# EAGLE board SparkFun_Color_Sensor_OPT4048_Mini-Panel (EAGLE 9.6.2), part 1 of 6
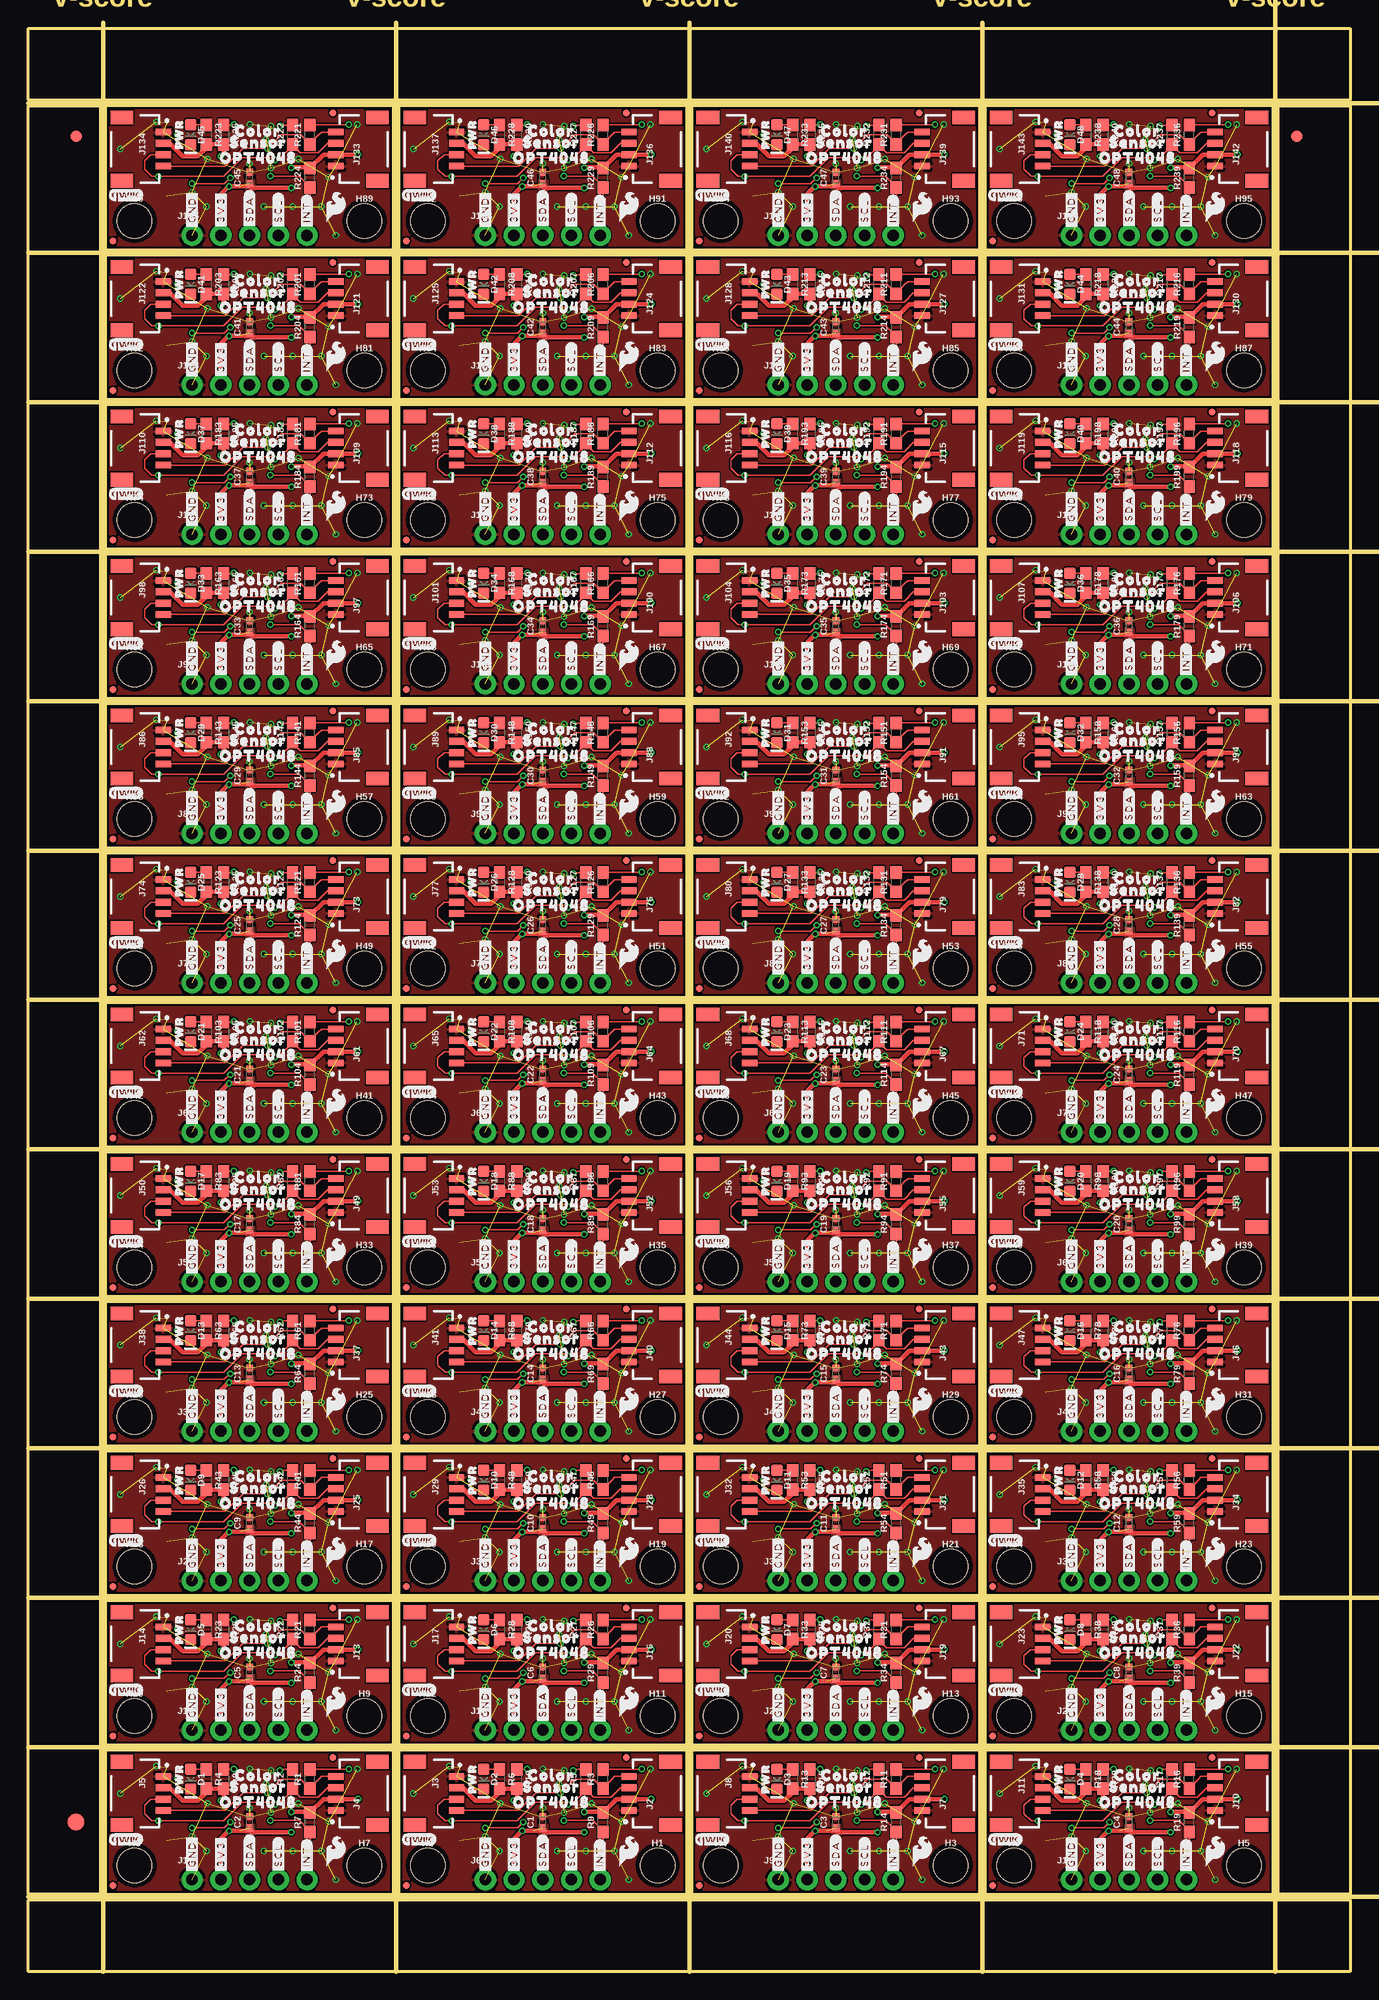
[diagram p0: board, top side]
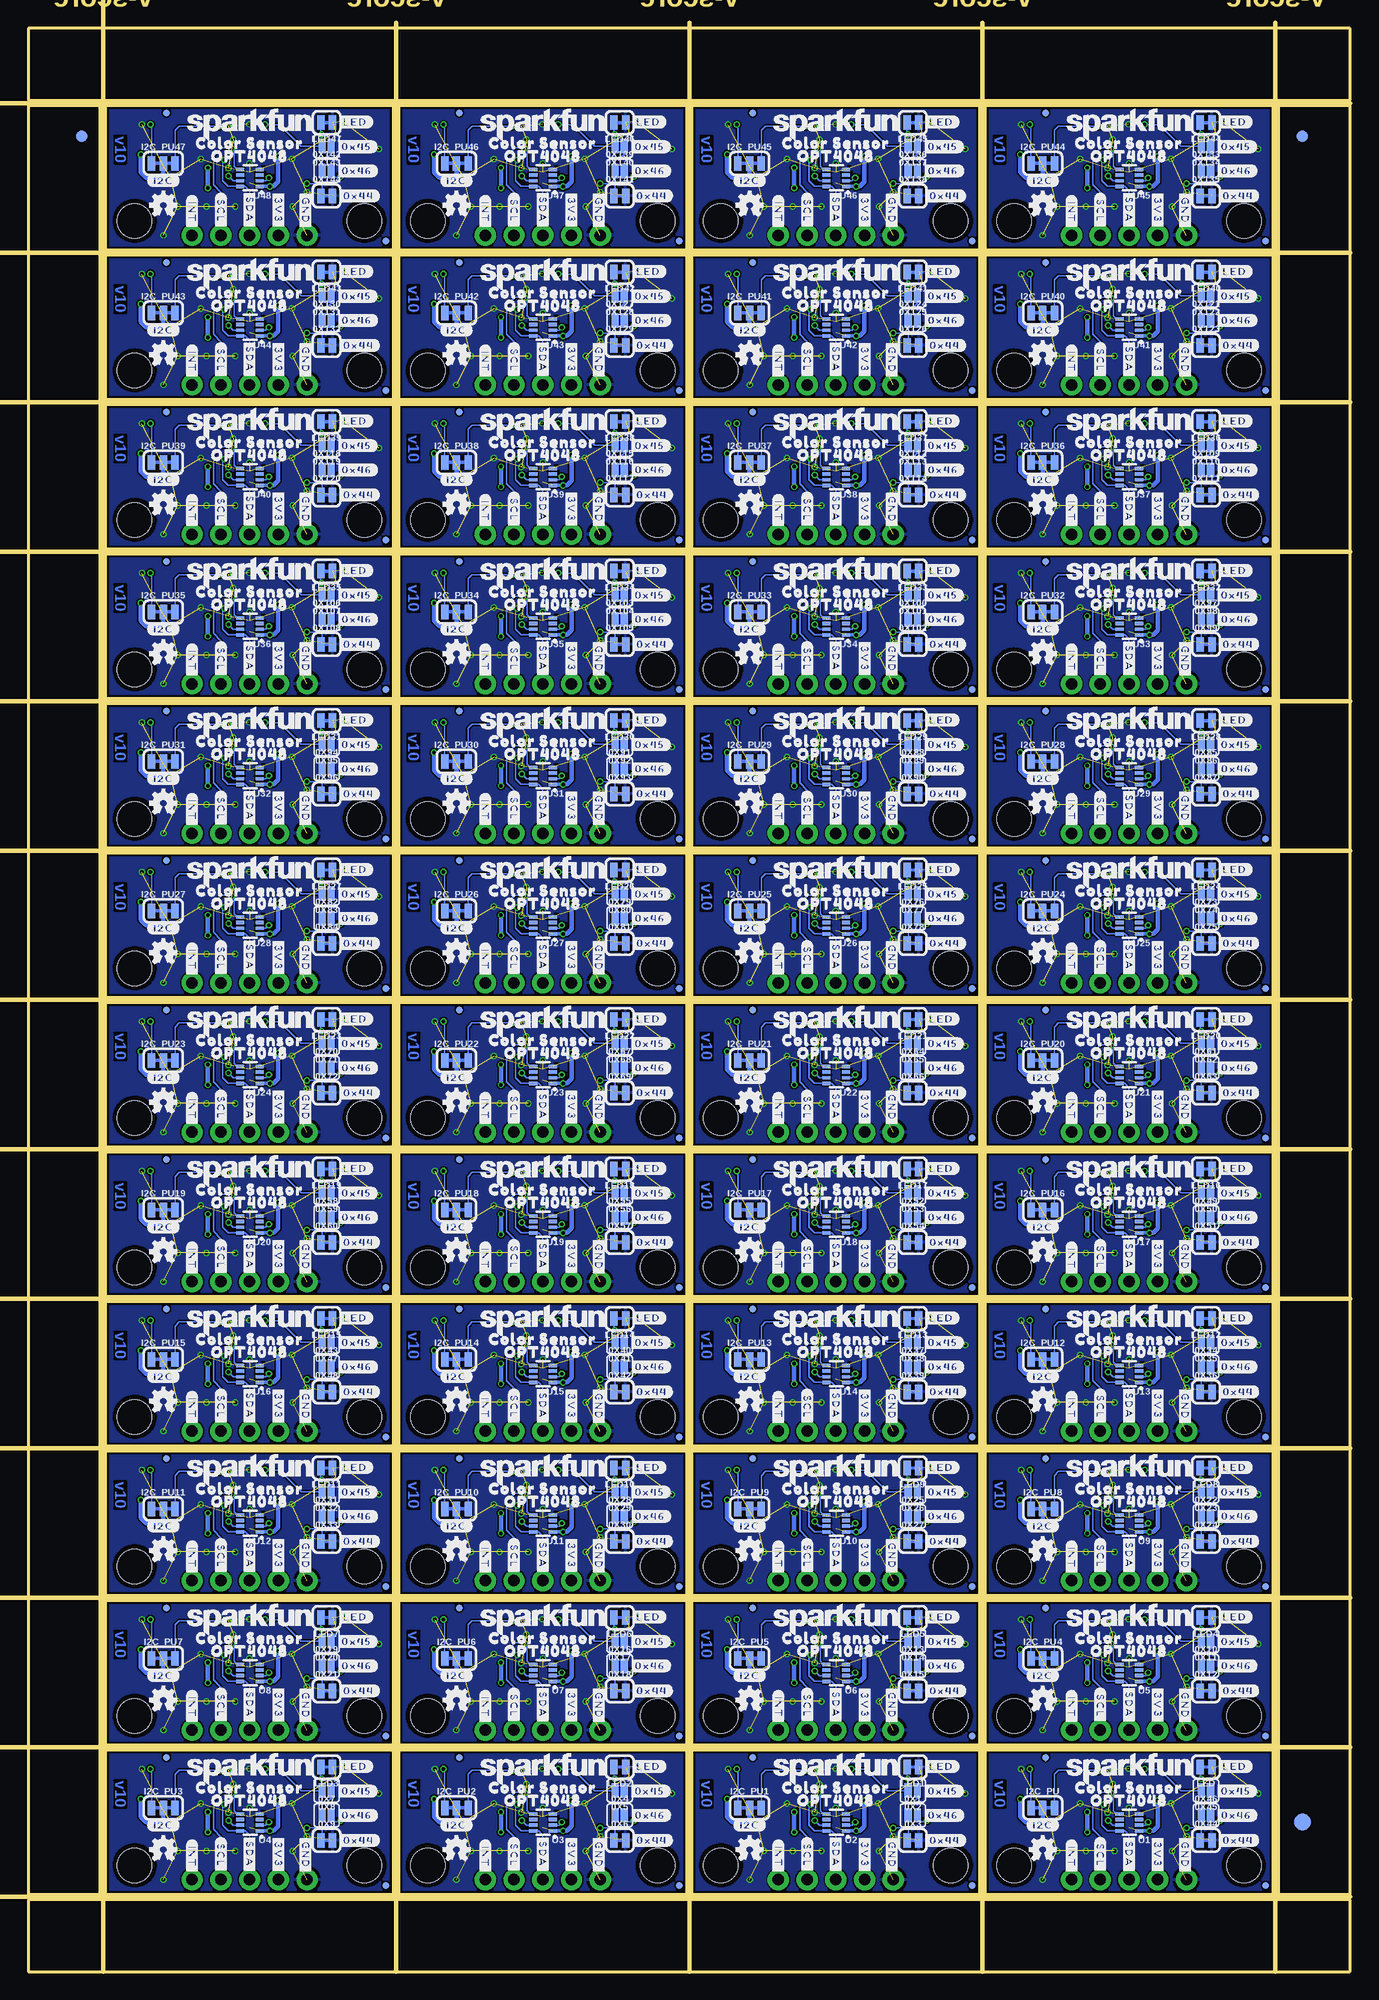
[diagram p1: board, bottom side, seen from below]

Size 116.84 x 171.7 mm. Coordinates in mm from the lower left corner, seen from the top.
Outline: 208 segments
Copper layers (1*16): Top 0.035mm / dielectric 1.5mm / Bottom 0.035mm
Design rules "SparkFun_Color_Sensor_OPT4048_Mini": minimum track width 5mil, minimum drill 0.3mm, track to track 5mil, track to pad 5mil, pad to pad 5mil, via to via 5mil, smd to smd 5mil, copper to edge 7mil, drill to drill 7mil, minimum pad ring 5mil, minimum via ring 5mil, stop-mask expansion 2.5mil, vias tented up to drill 25mil, thermal gap 10mil
Milling: 18 lines

## Footprints (pad centres in the part's own frame; a part is rotated, then mirrored left to right if it is on the bottom)
SMT-JUMPER_2_NO_SILK = smd 0.635 x 1.27: 1 -0.406,0; 2 0.406,0
SMT-JUMPER_2_NC_TRACE_SILK = smd 0.66 x 1.27: 1 -0.521,0; 2 0.521,0
0402-TIGHT = smd 0.6 x 0.6: 1 -0.5,0; 2 0.5,0
LED-0603 = smd 1 x 1: A -0.877,0; C 0.877,0
FIDUCIAL-1X2 = smd 1 x 1: 1 0,0
FIDUCIAL-1.5X3 = smd 1.5 x 1.5: 1 0,0
FIDUCIAL-MICRO = smd 0.635 x 0.635: 1 0,0
STAND-OFF-TIGHT = hole 3.048: 0,0
SMT-JUMPER_3_2-NC_TRACE_SILK = smd 0.66 x 1.27: 1 -1.041,0; 2 0,0; 3 1.041,0
1X05_NO_SILK = drill 1.016 pad 1.88: 1 0,0; 2 2.54,0; 3 5.08,0; 4 7.62,0; 5 10.16,0
JST04_1MM_RA = smd 0.6 x 1.35: 1 -1.5,0; 2 -0.5,0; 3 0.5,0; 4 1.5,0 | smd 1.2 x 2: NC1 2.8,-3.675; NC2 -2.8,-3.675
0603 = smd 1.1 x 1: 1 -0.85,0; 2 0.85,0
FCSOT = smd 0.72 x 0.3: P1 -0.889,0.762; P2 -0.889,0.262; P3 -0.889,-0.238; P4 -0.889,-0.738; P5 0.831,-0.738; P6 0.831,-0.238; P7 0.831,0.262; P8 0.831,0.762

## Placement (x,y rotation side)
0X1  JUMPER-SMT_2_NO_SILK  [SMT-JUMPER_2_NO_SILK]  38.66,13.82 0 bottom
0X2  JUMPER-SMT_2_NO_SILK  [SMT-JUMPER_2_NO_SILK]  38.66,16 180 bottom
0X3  JUMPER-SMT_2_NC_TRACE_SILK  [SMT-JUMPER_2_NC_TRACE_SILK]  38.66,11.61 0 bottom
0X4  JUMPER-SMT_2_NO_SILK  [SMT-JUMPER_2_NO_SILK]  64.57,13.82 0 bottom
0X5  JUMPER-SMT_2_NO_SILK  [SMT-JUMPER_2_NO_SILK]  64.57,16 180 bottom
0X6  JUMPER-SMT_2_NC_TRACE_SILK  [SMT-JUMPER_2_NC_TRACE_SILK]  64.57,11.61 0 bottom
0X7  JUMPER-SMT_2_NO_SILK  [SMT-JUMPER_2_NO_SILK]  90.47,13.82 0 bottom
0X8  JUMPER-SMT_2_NO_SILK  [SMT-JUMPER_2_NO_SILK]  90.47,16 180 bottom
0X9  JUMPER-SMT_2_NC_TRACE_SILK  [SMT-JUMPER_2_NC_TRACE_SILK]  90.47,11.61 0 bottom
0X10  JUMPER-SMT_2_NO_SILK  [SMT-JUMPER_2_NO_SILK]  12.75,27.03 0 bottom
0X11  JUMPER-SMT_2_NO_SILK  [SMT-JUMPER_2_NO_SILK]  12.75,29.21 180 bottom
0X12  JUMPER-SMT_2_NC_TRACE_SILK  [SMT-JUMPER_2_NC_TRACE_SILK]  12.75,24.82 0 bottom
0X13  JUMPER-SMT_2_NO_SILK  [SMT-JUMPER_2_NO_SILK]  38.66,27.03 0 bottom
0X14  JUMPER-SMT_2_NO_SILK  [SMT-JUMPER_2_NO_SILK]  38.66,29.21 180 bottom
0X15  JUMPER-SMT_2_NC_TRACE_SILK  [SMT-JUMPER_2_NC_TRACE_SILK]  38.66,24.82 0 bottom
0X16  JUMPER-SMT_2_NO_SILK  [SMT-JUMPER_2_NO_SILK]  64.57,27.03 0 bottom
0X17  JUMPER-SMT_2_NO_SILK  [SMT-JUMPER_2_NO_SILK]  64.57,29.21 180 bottom
0X18  JUMPER-SMT_2_NC_TRACE_SILK  [SMT-JUMPER_2_NC_TRACE_SILK]  64.57,24.82 0 bottom
0X19  JUMPER-SMT_2_NO_SILK  [SMT-JUMPER_2_NO_SILK]  90.47,27.03 0 bottom
0X20  JUMPER-SMT_2_NO_SILK  [SMT-JUMPER_2_NO_SILK]  90.47,29.21 180 bottom
0X21  JUMPER-SMT_2_NC_TRACE_SILK  [SMT-JUMPER_2_NC_TRACE_SILK]  90.47,24.82 0 bottom
0X22  JUMPER-SMT_2_NO_SILK  [SMT-JUMPER_2_NO_SILK]  12.75,40.23 0 bottom
0X23  JUMPER-SMT_2_NO_SILK  [SMT-JUMPER_2_NO_SILK]  12.75,42.42 180 bottom
0X24  JUMPER-SMT_2_NC_TRACE_SILK  [SMT-JUMPER_2_NC_TRACE_SILK]  12.75,38.02 0 bottom
0X25  JUMPER-SMT_2_NO_SILK  [SMT-JUMPER_2_NO_SILK]  38.66,40.23 0 bottom
0X26  JUMPER-SMT_2_NO_SILK  [SMT-JUMPER_2_NO_SILK]  38.66,42.42 180 bottom
0X27  JUMPER-SMT_2_NC_TRACE_SILK  [SMT-JUMPER_2_NC_TRACE_SILK]  38.66,38.02 0 bottom
0X28  JUMPER-SMT_2_NO_SILK  [SMT-JUMPER_2_NO_SILK]  64.57,40.23 0 bottom
0X29  JUMPER-SMT_2_NO_SILK  [SMT-JUMPER_2_NO_SILK]  64.57,42.42 180 bottom
0X30  JUMPER-SMT_2_NC_TRACE_SILK  [SMT-JUMPER_2_NC_TRACE_SILK]  64.57,38.02 0 bottom
0X31  JUMPER-SMT_2_NO_SILK  [SMT-JUMPER_2_NO_SILK]  90.47,40.23 0 bottom
0X32  JUMPER-SMT_2_NO_SILK  [SMT-JUMPER_2_NO_SILK]  90.47,42.42 180 bottom
0X33  JUMPER-SMT_2_NC_TRACE_SILK  [SMT-JUMPER_2_NC_TRACE_SILK]  90.47,38.02 0 bottom
0X34  JUMPER-SMT_2_NO_SILK  [SMT-JUMPER_2_NO_SILK]  12.75,53.44 0 bottom
0X35  JUMPER-SMT_2_NO_SILK  [SMT-JUMPER_2_NO_SILK]  12.75,55.63 180 bottom
0X36  JUMPER-SMT_2_NC_TRACE_SILK  [SMT-JUMPER_2_NC_TRACE_SILK]  12.75,51.23 0 bottom
0X37  JUMPER-SMT_2_NO_SILK  [SMT-JUMPER_2_NO_SILK]  38.66,53.44 0 bottom
0X38  JUMPER-SMT_2_NO_SILK  [SMT-JUMPER_2_NO_SILK]  38.66,55.63 180 bottom
0X39  JUMPER-SMT_2_NC_TRACE_SILK  [SMT-JUMPER_2_NC_TRACE_SILK]  38.66,51.23 0 bottom
0X40  JUMPER-SMT_2_NO_SILK  [SMT-JUMPER_2_NO_SILK]  64.57,53.44 0 bottom
0X41  JUMPER-SMT_2_NO_SILK  [SMT-JUMPER_2_NO_SILK]  64.57,55.63 180 bottom
0X42  JUMPER-SMT_2_NC_TRACE_SILK  [SMT-JUMPER_2_NC_TRACE_SILK]  64.57,51.23 0 bottom
0X43  JUMPER-SMT_2_NO_SILK  [SMT-JUMPER_2_NO_SILK]  90.47,53.44 0 bottom
0X44  JUMPER-SMT_2_NC_TRACE_SILK  [SMT-JUMPER_2_NC_TRACE_SILK]  12.75,11.61 0 bottom
0X45  JUMPER-SMT_2_NO_SILK  [SMT-JUMPER_2_NO_SILK]  12.75,16 180 bottom
0X46  JUMPER-SMT_2_NO_SILK  [SMT-JUMPER_2_NO_SILK]  12.75,13.82 0 bottom
0X47  JUMPER-SMT_2_NO_SILK  [SMT-JUMPER_2_NO_SILK]  90.47,55.63 180 bottom
0X48  JUMPER-SMT_2_NC_TRACE_SILK  [SMT-JUMPER_2_NC_TRACE_SILK]  90.47,51.23 0 bottom
0X49  JUMPER-SMT_2_NO_SILK  [SMT-JUMPER_2_NO_SILK]  12.75,66.65 0 bottom
0X50  JUMPER-SMT_2_NO_SILK  [SMT-JUMPER_2_NO_SILK]  12.75,68.83 180 bottom
0X51  JUMPER-SMT_2_NC_TRACE_SILK  [SMT-JUMPER_2_NC_TRACE_SILK]  12.75,64.44 0 bottom
0X52  JUMPER-SMT_2_NO_SILK  [SMT-JUMPER_2_NO_SILK]  38.66,66.65 0 bottom
0X53  JUMPER-SMT_2_NO_SILK  [SMT-JUMPER_2_NO_SILK]  38.66,68.83 180 bottom
0X54  JUMPER-SMT_2_NC_TRACE_SILK  [SMT-JUMPER_2_NC_TRACE_SILK]  38.66,64.44 0 bottom
0X55  JUMPER-SMT_2_NO_SILK  [SMT-JUMPER_2_NO_SILK]  64.57,66.65 0 bottom
0X56  JUMPER-SMT_2_NO_SILK  [SMT-JUMPER_2_NO_SILK]  64.57,68.83 180 bottom
0X57  JUMPER-SMT_2_NC_TRACE_SILK  [SMT-JUMPER_2_NC_TRACE_SILK]  64.57,64.44 0 bottom
0X58  JUMPER-SMT_2_NO_SILK  [SMT-JUMPER_2_NO_SILK]  90.47,66.65 0 bottom
0X59  JUMPER-SMT_2_NO_SILK  [SMT-JUMPER_2_NO_SILK]  90.47,68.83 180 bottom
0X60  JUMPER-SMT_2_NC_TRACE_SILK  [SMT-JUMPER_2_NC_TRACE_SILK]  90.47,64.44 0 bottom
0X61  JUMPER-SMT_2_NO_SILK  [SMT-JUMPER_2_NO_SILK]  12.75,79.86 0 bottom
0X62  JUMPER-SMT_2_NO_SILK  [SMT-JUMPER_2_NO_SILK]  12.75,82.04 180 bottom
0X63  JUMPER-SMT_2_NC_TRACE_SILK  [SMT-JUMPER_2_NC_TRACE_SILK]  12.75,77.65 0 bottom
0X64  JUMPER-SMT_2_NO_SILK  [SMT-JUMPER_2_NO_SILK]  38.66,79.86 0 bottom
0X65  JUMPER-SMT_2_NO_SILK  [SMT-JUMPER_2_NO_SILK]  38.66,82.04 180 bottom
0X66  JUMPER-SMT_2_NC_TRACE_SILK  [SMT-JUMPER_2_NC_TRACE_SILK]  38.66,77.65 0 bottom
0X67  JUMPER-SMT_2_NO_SILK  [SMT-JUMPER_2_NO_SILK]  64.57,79.86 0 bottom
0X68  JUMPER-SMT_2_NO_SILK  [SMT-JUMPER_2_NO_SILK]  64.57,82.04 180 bottom
0X69  JUMPER-SMT_2_NC_TRACE_SILK  [SMT-JUMPER_2_NC_TRACE_SILK]  64.57,77.65 0 bottom
0X70  JUMPER-SMT_2_NO_SILK  [SMT-JUMPER_2_NO_SILK]  90.47,79.86 0 bottom
0X71  JUMPER-SMT_2_NO_SILK  [SMT-JUMPER_2_NO_SILK]  90.47,82.04 180 bottom
0X72  JUMPER-SMT_2_NC_TRACE_SILK  [SMT-JUMPER_2_NC_TRACE_SILK]  90.47,77.65 0 bottom
0X73  JUMPER-SMT_2_NO_SILK  [SMT-JUMPER_2_NO_SILK]  12.75,93.07 0 bottom
0X74  JUMPER-SMT_2_NO_SILK  [SMT-JUMPER_2_NO_SILK]  12.75,95.25 180 bottom
0X75  JUMPER-SMT_2_NC_TRACE_SILK  [SMT-JUMPER_2_NC_TRACE_SILK]  12.75,90.86 0 bottom
0X76  JUMPER-SMT_2_NO_SILK  [SMT-JUMPER_2_NO_SILK]  38.66,93.07 0 bottom
0X77  JUMPER-SMT_2_NO_SILK  [SMT-JUMPER_2_NO_SILK]  38.66,95.25 180 bottom
0X78  JUMPER-SMT_2_NC_TRACE_SILK  [SMT-JUMPER_2_NC_TRACE_SILK]  38.66,90.86 0 bottom
0X79  JUMPER-SMT_2_NO_SILK  [SMT-JUMPER_2_NO_SILK]  64.57,93.07 0 bottom
0X80  JUMPER-SMT_2_NO_SILK  [SMT-JUMPER_2_NO_SILK]  64.57,95.25 180 bottom
0X81  JUMPER-SMT_2_NC_TRACE_SILK  [SMT-JUMPER_2_NC_TRACE_SILK]  64.57,90.86 0 bottom
0X82  JUMPER-SMT_2_NO_SILK  [SMT-JUMPER_2_NO_SILK]  90.47,93.07 0 bottom
0X83  JUMPER-SMT_2_NO_SILK  [SMT-JUMPER_2_NO_SILK]  90.47,95.25 180 bottom
0X84  JUMPER-SMT_2_NC_TRACE_SILK  [SMT-JUMPER_2_NC_TRACE_SILK]  90.47,90.86 0 bottom
0X85  JUMPER-SMT_2_NO_SILK  [SMT-JUMPER_2_NO_SILK]  12.75,106.27 0 bottom
0X86  JUMPER-SMT_2_NO_SILK  [SMT-JUMPER_2_NO_SILK]  12.75,108.46 180 bottom
0X87  JUMPER-SMT_2_NC_TRACE_SILK  [SMT-JUMPER_2_NC_TRACE_SILK]  12.75,104.06 0 bottom
0X88  JUMPER-SMT_2_NO_SILK  [SMT-JUMPER_2_NO_SILK]  38.66,106.27 0 bottom
0X89  JUMPER-SMT_2_NO_SILK  [SMT-JUMPER_2_NO_SILK]  38.66,108.46 180 bottom
0X90  JUMPER-SMT_2_NC_TRACE_SILK  [SMT-JUMPER_2_NC_TRACE_SILK]  38.66,104.06 0 bottom
0X91  JUMPER-SMT_2_NO_SILK  [SMT-JUMPER_2_NO_SILK]  64.57,106.27 0 bottom
0X92  JUMPER-SMT_2_NO_SILK  [SMT-JUMPER_2_NO_SILK]  64.57,108.46 180 bottom
0X93  JUMPER-SMT_2_NC_TRACE_SILK  [SMT-JUMPER_2_NC_TRACE_SILK]  64.57,104.06 0 bottom
0X94  JUMPER-SMT_2_NO_SILK  [SMT-JUMPER_2_NO_SILK]  90.47,106.27 0 bottom
0X95  JUMPER-SMT_2_NO_SILK  [SMT-JUMPER_2_NO_SILK]  90.47,108.46 180 bottom
0X96  JUMPER-SMT_2_NC_TRACE_SILK  [SMT-JUMPER_2_NC_TRACE_SILK]  90.47,104.06 0 bottom
0X97  JUMPER-SMT_2_NO_SILK  [SMT-JUMPER_2_NO_SILK]  12.75,119.48 0 bottom
0X98  JUMPER-SMT_2_NO_SILK  [SMT-JUMPER_2_NO_SILK]  12.75,121.67 180 bottom
0X99  JUMPER-SMT_2_NC_TRACE_SILK  [SMT-JUMPER_2_NC_TRACE_SILK]  12.75,117.27 0 bottom
0X100  JUMPER-SMT_2_NO_SILK  [SMT-JUMPER_2_NO_SILK]  38.66,119.48 0 bottom
0X101  JUMPER-SMT_2_NO_SILK  [SMT-JUMPER_2_NO_SILK]  38.66,121.67 180 bottom
0X102  JUMPER-SMT_2_NC_TRACE_SILK  [SMT-JUMPER_2_NC_TRACE_SILK]  38.66,117.27 0 bottom
0X103  JUMPER-SMT_2_NO_SILK  [SMT-JUMPER_2_NO_SILK]  64.57,119.48 0 bottom
0X104  JUMPER-SMT_2_NO_SILK  [SMT-JUMPER_2_NO_SILK]  64.57,121.67 180 bottom
0X105  JUMPER-SMT_2_NC_TRACE_SILK  [SMT-JUMPER_2_NC_TRACE_SILK]  64.57,117.27 0 bottom
0X106  JUMPER-SMT_2_NO_SILK  [SMT-JUMPER_2_NO_SILK]  90.47,119.48 0 bottom
0X107  JUMPER-SMT_2_NO_SILK  [SMT-JUMPER_2_NO_SILK]  90.47,121.67 180 bottom
0X108  JUMPER-SMT_2_NC_TRACE_SILK  [SMT-JUMPER_2_NC_TRACE_SILK]  90.47,117.27 0 bottom
0X109  JUMPER-SMT_2_NO_SILK  [SMT-JUMPER_2_NO_SILK]  12.75,132.69 0 bottom
0X110  JUMPER-SMT_2_NO_SILK  [SMT-JUMPER_2_NO_SILK]  12.75,134.87 180 bottom
0X111  JUMPER-SMT_2_NC_TRACE_SILK  [SMT-JUMPER_2_NC_TRACE_SILK]  12.75,130.48 0 bottom
0X112  JUMPER-SMT_2_NO_SILK  [SMT-JUMPER_2_NO_SILK]  38.66,132.69 0 bottom
0X113  JUMPER-SMT_2_NO_SILK  [SMT-JUMPER_2_NO_SILK]  38.66,134.87 180 bottom
0X114  JUMPER-SMT_2_NC_TRACE_SILK  [SMT-JUMPER_2_NC_TRACE_SILK]  38.66,130.48 0 bottom
0X115  JUMPER-SMT_2_NO_SILK  [SMT-JUMPER_2_NO_SILK]  64.57,132.69 0 bottom
0X116  JUMPER-SMT_2_NO_SILK  [SMT-JUMPER_2_NO_SILK]  64.57,134.87 180 bottom
0X117  JUMPER-SMT_2_NC_TRACE_SILK  [SMT-JUMPER_2_NC_TRACE_SILK]  64.57,130.48 0 bottom
0X118  JUMPER-SMT_2_NO_SILK  [SMT-JUMPER_2_NO_SILK]  90.47,132.69 0 bottom
0X119  JUMPER-SMT_2_NO_SILK  [SMT-JUMPER_2_NO_SILK]  90.47,134.87 180 bottom
0X120  JUMPER-SMT_2_NC_TRACE_SILK  [SMT-JUMPER_2_NC_TRACE_SILK]  90.47,130.48 0 bottom
0X121  JUMPER-SMT_2_NO_SILK  [SMT-JUMPER_2_NO_SILK]  12.75,145.9 0 bottom
0X122  JUMPER-SMT_2_NO_SILK  [SMT-JUMPER_2_NO_SILK]  12.75,148.08 180 bottom
0X123  JUMPER-SMT_2_NC_TRACE_SILK  [SMT-JUMPER_2_NC_TRACE_SILK]  12.75,143.69 0 bottom
0X124  JUMPER-SMT_2_NO_SILK  [SMT-JUMPER_2_NO_SILK]  38.66,145.9 0 bottom
0X125  JUMPER-SMT_2_NO_SILK  [SMT-JUMPER_2_NO_SILK]  38.66,148.08 180 bottom
0X126  JUMPER-SMT_2_NC_TRACE_SILK  [SMT-JUMPER_2_NC_TRACE_SILK]  38.66,143.69 0 bottom
0X127  JUMPER-SMT_2_NO_SILK  [SMT-JUMPER_2_NO_SILK]  64.57,145.9 0 bottom
0X128  JUMPER-SMT_2_NO_SILK  [SMT-JUMPER_2_NO_SILK]  64.57,148.08 180 bottom
0X129  JUMPER-SMT_2_NC_TRACE_SILK  [SMT-JUMPER_2_NC_TRACE_SILK]  64.57,143.69 0 bottom
0X130  JUMPER-SMT_2_NO_SILK  [SMT-JUMPER_2_NO_SILK]  90.47,145.9 0 bottom
0X131  JUMPER-SMT_2_NO_SILK  [SMT-JUMPER_2_NO_SILK]  90.47,148.08 180 bottom
0X132  JUMPER-SMT_2_NC_TRACE_SILK  [SMT-JUMPER_2_NC_TRACE_SILK]  90.47,143.69 0 bottom
0X133  JUMPER-SMT_2_NO_SILK  [SMT-JUMPER_2_NO_SILK]  12.75,159.11 0 bottom
0X134  JUMPER-SMT_2_NO_SILK  [SMT-JUMPER_2_NO_SILK]  12.75,161.29 180 bottom
0X135  JUMPER-SMT_2_NC_TRACE_SILK  [SMT-JUMPER_2_NC_TRACE_SILK]  12.75,156.9 0 bottom
0X136  JUMPER-SMT_2_NO_SILK  [SMT-JUMPER_2_NO_SILK]  38.66,159.11 0 bottom
0X137  JUMPER-SMT_2_NO_SILK  [SMT-JUMPER_2_NO_SILK]  38.66,161.29 180 bottom
0X138  JUMPER-SMT_2_NC_TRACE_SILK  [SMT-JUMPER_2_NC_TRACE_SILK]  38.66,156.9 0 bottom
0X139  JUMPER-SMT_2_NO_SILK  [SMT-JUMPER_2_NO_SILK]  64.57,159.11 0 bottom
0X140  JUMPER-SMT_2_NO_SILK  [SMT-JUMPER_2_NO_SILK]  64.57,161.29 180 bottom
0X141  JUMPER-SMT_2_NC_TRACE_SILK  [SMT-JUMPER_2_NC_TRACE_SILK]  64.57,156.9 0 bottom
0X142  JUMPER-SMT_2_NO_SILK  [SMT-JUMPER_2_NO_SILK]  90.47,159.11 0 bottom
0X143  JUMPER-SMT_2_NO_SILK  [SMT-JUMPER_2_NO_SILK]  90.47,161.29 180 bottom
0X144  JUMPER-SMT_2_NC_TRACE_SILK  [SMT-JUMPER_2_NC_TRACE_SILK]  90.47,156.9 0 bottom
C1  0.1uF  [0402-TIGHT]  45.47,13.21 90 top
C2  0.1uF  [0402-TIGHT]  19.56,13.21 90 top
C3  0.1uF  [0402-TIGHT]  71.37,13.21 90 top
C4  0.1uF  [0402-TIGHT]  97.28,13.21 90 top
C5  0.1uF  [0402-TIGHT]  19.56,26.42 90 top
C6  0.1uF  [0402-TIGHT]  45.47,26.42 90 top
C7  0.1uF  [0402-TIGHT]  71.37,26.42 90 top
C8  0.1uF  [0402-TIGHT]  97.28,26.42 90 top
C9  0.1uF  [0402-TIGHT]  19.56,39.62 90 top
C10  0.1uF  [0402-TIGHT]  45.47,39.62 90 top
C11  0.1uF  [0402-TIGHT]  71.37,39.62 90 top
C12  0.1uF  [0402-TIGHT]  97.28,39.62 90 top
C13  0.1uF  [0402-TIGHT]  19.56,52.83 90 top
C14  0.1uF  [0402-TIGHT]  45.47,52.83 90 top
C15  0.1uF  [0402-TIGHT]  71.37,52.83 90 top
C16  0.1uF  [0402-TIGHT]  97.28,52.83 90 top
C17  0.1uF  [0402-TIGHT]  19.56,66.04 90 top
C18  0.1uF  [0402-TIGHT]  45.47,66.04 90 top
C19  0.1uF  [0402-TIGHT]  71.37,66.04 90 top
C20  0.1uF  [0402-TIGHT]  97.28,66.04 90 top
C21  0.1uF  [0402-TIGHT]  19.56,79.25 90 top
C22  0.1uF  [0402-TIGHT]  45.47,79.25 90 top
C23  0.1uF  [0402-TIGHT]  71.37,79.25 90 top
C24  0.1uF  [0402-TIGHT]  97.28,79.25 90 top
C25  0.1uF  [0402-TIGHT]  19.56,92.46 90 top
C26  0.1uF  [0402-TIGHT]  45.47,92.46 90 top
C27  0.1uF  [0402-TIGHT]  71.37,92.46 90 top
C28  0.1uF  [0402-TIGHT]  97.28,92.46 90 top
C29  0.1uF  [0402-TIGHT]  19.56,105.66 90 top
C30  0.1uF  [0402-TIGHT]  45.47,105.66 90 top
C31  0.1uF  [0402-TIGHT]  71.37,105.66 90 top
C32  0.1uF  [0402-TIGHT]  97.28,105.66 90 top
C33  0.1uF  [0402-TIGHT]  19.56,118.87 90 top
C34  0.1uF  [0402-TIGHT]  45.47,118.87 90 top
C35  0.1uF  [0402-TIGHT]  71.37,118.87 90 top
C36  0.1uF  [0402-TIGHT]  97.28,118.87 90 top
C37  0.1uF  [0402-TIGHT]  19.56,132.08 90 top
C38  0.1uF  [0402-TIGHT]  45.47,132.08 90 top
C39  0.1uF  [0402-TIGHT]  71.37,132.08 90 top
C40  0.1uF  [0402-TIGHT]  97.28,132.08 90 top
C41  0.1uF  [0402-TIGHT]  19.56,145.29 90 top
C42  0.1uF  [0402-TIGHT]  45.47,145.29 90 top
C43  0.1uF  [0402-TIGHT]  71.37,145.29 90 top
C44  0.1uF  [0402-TIGHT]  97.28,145.29 90 top
C45  0.1uF  [0402-TIGHT]  19.56,158.5 90 top
C46  0.1uF  [0402-TIGHT]  45.47,158.5 90 top
C47  0.1uF  [0402-TIGHT]  71.37,158.5 90 top
C48  0.1uF  [0402-TIGHT]  97.28,158.5 90 top
D1  RED  [LED-0603]  14.35,17.02 270 top
D2  RED  [LED-0603]  40.26,17.02 270 top
D3  RED  [LED-0603]  66.17,17.02 270 top
D4  RED  [LED-0603]  92.08,17.02 270 top
D5  RED  [LED-0603]  14.35,30.23 270 top
D6  RED  [LED-0603]  40.26,30.23 270 top
D7  RED  [LED-0603]  66.17,30.23 270 top
D8  RED  [LED-0603]  92.08,30.23 270 top
D9  RED  [LED-0603]  14.35,43.43 270 top
D10  RED  [LED-0603]  40.26,43.43 270 top
D11  RED  [LED-0603]  66.17,43.43 270 top
D12  RED  [LED-0603]  92.08,43.43 270 top
D13  RED  [LED-0603]  14.35,56.64 270 top
D14  RED  [LED-0603]  40.26,56.64 270 top
D15  RED  [LED-0603]  66.17,56.64 270 top
D16  RED  [LED-0603]  92.08,56.64 270 top
D17  RED  [LED-0603]  14.35,69.85 270 top
D18  RED  [LED-0603]  40.26,69.85 270 top
D19  RED  [LED-0603]  66.17,69.85 270 top
D20  RED  [LED-0603]  92.08,69.85 270 top
D21  RED  [LED-0603]  14.35,83.06 270 top
D22  RED  [LED-0603]  40.26,83.06 270 top
D23  RED  [LED-0603]  66.17,83.06 270 top
D24  RED  [LED-0603]  92.08,83.06 270 top
D25  RED  [LED-0603]  14.35,96.27 270 top
D26  RED  [LED-0603]  40.26,96.27 270 top
D27  RED  [LED-0603]  66.17,96.27 270 top
D28  RED  [LED-0603]  92.08,96.27 270 top
D29  RED  [LED-0603]  14.35,109.47 270 top
D30  RED  [LED-0603]  40.26,109.47 270 top
D31  RED  [LED-0603]  66.17,109.47 270 top
D32  RED  [LED-0603]  92.08,109.47 270 top
D33  RED  [LED-0603]  14.35,122.68 270 top
D34  RED  [LED-0603]  40.26,122.68 270 top
D35  RED  [LED-0603]  66.17,122.68 270 top
D36  RED  [LED-0603]  92.08,122.68 270 top
D37  RED  [LED-0603]  14.35,135.89 270 top
D38  RED  [LED-0603]  40.26,135.89 270 top
D39  RED  [LED-0603]  66.17,135.89 270 top
D40  RED  [LED-0603]  92.08,135.89 270 top
D41  RED  [LED-0603]  14.35,149.1 270 top
D42  RED  [LED-0603]  40.26,149.1 270 top
D43  RED  [LED-0603]  66.17,149.1 270 top
D44  RED  [LED-0603]  92.08,149.1 270 top
D45  RED  [LED-0603]  14.35,162.31 270 top
D46  RED  [LED-0603]  40.26,162.31 270 top
D47  RED  [LED-0603]  66.17,162.31 270 top
D48  RED  [LED-0603]  92.08,162.31 270 top
E$1  [FIDUCIAL-1X2]  4.23,162.18 0 top
E$2  [FIDUCIAL-1X2]  4.23,162.18 0 bottom
E$3  [FIDUCIAL-1X2]  112.1,162.18 0 top
E$4  [FIDUCIAL-1X2]  112.1,162.18 0 bottom
E$5  [FIDUCIAL-1.5X3]  4.23,13.21 0 top
E$6  [FIDUCIAL-1.5X3]  4.23,13.21 0 bottom
FD1  FIDUCIALUFIDUCIAL  [FIDUCIAL-MICRO]  52.83,18.92 0 bottom
FD2  FIDUCIALUFIDUCIAL  [FIDUCIAL-MICRO]  33.4,7.62 0 bottom
FD3  FIDUCIALUFIDUCIAL  [FIDUCIAL-MICRO]  33.4,7.62 0 top
FD4  FIDUCIALUFIDUCIAL  [FIDUCIAL-MICRO]  52.83,18.92 0 top
FD5  FIDUCIALUFIDUCIAL  [FIDUCIAL-MICRO]  26.92,18.92 0 bottom
FD6  FIDUCIALUFIDUCIAL  [FIDUCIAL-MICRO]  7.49,7.62 0 bottom
FD7  FIDUCIALUFIDUCIAL  [FIDUCIAL-MICRO]  7.49,7.62 0 top
FD8  FIDUCIALUFIDUCIAL  [FIDUCIAL-MICRO]  26.92,18.92 0 top
FD9  FIDUCIALUFIDUCIAL  [FIDUCIAL-MICRO]  78.74,18.92 0 bottom
FD10  FIDUCIALUFIDUCIAL  [FIDUCIAL-MICRO]  59.31,7.62 0 bottom
FD11  FIDUCIALUFIDUCIAL  [FIDUCIAL-MICRO]  59.31,7.62 0 top
FD12  FIDUCIALUFIDUCIAL  [FIDUCIAL-MICRO]  78.74,18.92 0 top
FD13  FIDUCIALUFIDUCIAL  [FIDUCIAL-MICRO]  104.65,18.92 0 bottom
FD14  FIDUCIALUFIDUCIAL  [FIDUCIAL-MICRO]  85.22,7.62 0 bottom
FD15  FIDUCIALUFIDUCIAL  [FIDUCIAL-MICRO]  85.22,7.62 0 top
FD16  FIDUCIALUFIDUCIAL  [FIDUCIAL-MICRO]  104.65,18.92 0 top
FD17  FIDUCIALUFIDUCIAL  [FIDUCIAL-MICRO]  26.92,32.13 0 bottom
FD18  FIDUCIALUFIDUCIAL  [FIDUCIAL-MICRO]  7.49,20.83 0 bottom
FD19  FIDUCIALUFIDUCIAL  [FIDUCIAL-MICRO]  7.49,20.83 0 top
FD20  FIDUCIALUFIDUCIAL  [FIDUCIAL-MICRO]  26.92,32.13 0 top
FD21  FIDUCIALUFIDUCIAL  [FIDUCIAL-MICRO]  52.83,32.13 0 bottom
FD22  FIDUCIALUFIDUCIAL  [FIDUCIAL-MICRO]  33.4,20.83 0 bottom
FD23  FIDUCIALUFIDUCIAL  [FIDUCIAL-MICRO]  33.4,20.83 0 top
FD24  FIDUCIALUFIDUCIAL  [FIDUCIAL-MICRO]  52.83,32.13 0 top
FD25  FIDUCIALUFIDUCIAL  [FIDUCIAL-MICRO]  78.74,32.13 0 bottom
FD26  FIDUCIALUFIDUCIAL  [FIDUCIAL-MICRO]  59.31,20.83 0 bottom
FD27  FIDUCIALUFIDUCIAL  [FIDUCIAL-MICRO]  59.31,20.83 0 top
FD28  FIDUCIALUFIDUCIAL  [FIDUCIAL-MICRO]  78.74,32.13 0 top
FD29  FIDUCIALUFIDUCIAL  [FIDUCIAL-MICRO]  104.65,32.13 0 bottom
FD30  FIDUCIALUFIDUCIAL  [FIDUCIAL-MICRO]  85.22,20.83 0 bottom
FD31  FIDUCIALUFIDUCIAL  [FIDUCIAL-MICRO]  85.22,20.83 0 top
FD32  FIDUCIALUFIDUCIAL  [FIDUCIAL-MICRO]  104.65,32.13 0 top
FD33  FIDUCIALUFIDUCIAL  [FIDUCIAL-MICRO]  26.92,45.34 0 bottom
FD34  FIDUCIALUFIDUCIAL  [FIDUCIAL-MICRO]  7.49,34.04 0 bottom
FD35  FIDUCIALUFIDUCIAL  [FIDUCIAL-MICRO]  7.49,34.04 0 top
FD36  FIDUCIALUFIDUCIAL  [FIDUCIAL-MICRO]  26.92,45.34 0 top
FD37  FIDUCIALUFIDUCIAL  [FIDUCIAL-MICRO]  52.83,45.34 0 bottom
FD38  FIDUCIALUFIDUCIAL  [FIDUCIAL-MICRO]  33.4,34.04 0 bottom
FD39  FIDUCIALUFIDUCIAL  [FIDUCIAL-MICRO]  33.4,34.04 0 top
FD40  FIDUCIALUFIDUCIAL  [FIDUCIAL-MICRO]  52.83,45.34 0 top
FD41  FIDUCIALUFIDUCIAL  [FIDUCIAL-MICRO]  78.74,45.34 0 bottom
FD42  FIDUCIALUFIDUCIAL  [FIDUCIAL-MICRO]  59.31,34.04 0 bottom
FD43  FIDUCIALUFIDUCIAL  [FIDUCIAL-MICRO]  59.31,34.04 0 top
FD44  FIDUCIALUFIDUCIAL  [FIDUCIAL-MICRO]  78.74,45.34 0 top
FD45  FIDUCIALUFIDUCIAL  [FIDUCIAL-MICRO]  104.65,45.34 0 bottom
FD46  FIDUCIALUFIDUCIAL  [FIDUCIAL-MICRO]  85.22,34.04 0 bottom
FD47  FIDUCIALUFIDUCIAL  [FIDUCIAL-MICRO]  85.22,34.04 0 top
FD48  FIDUCIALUFIDUCIAL  [FIDUCIAL-MICRO]  104.65,45.34 0 top
FD49  FIDUCIALUFIDUCIAL  [FIDUCIAL-MICRO]  26.92,58.55 0 bottom
FD50  FIDUCIALUFIDUCIAL  [FIDUCIAL-MICRO]  7.49,47.24 0 bottom
FD51  FIDUCIALUFIDUCIAL  [FIDUCIAL-MICRO]  7.49,47.24 0 top
FD52  FIDUCIALUFIDUCIAL  [FIDUCIAL-MICRO]  26.92,58.55 0 top
FD53  FIDUCIALUFIDUCIAL  [FIDUCIAL-MICRO]  52.83,58.55 0 bottom
FD54  FIDUCIALUFIDUCIAL  [FIDUCIAL-MICRO]  33.4,47.24 0 bottom
FD55  FIDUCIALUFIDUCIAL  [FIDUCIAL-MICRO]  33.4,47.24 0 top
FD56  FIDUCIALUFIDUCIAL  [FIDUCIAL-MICRO]  52.83,58.55 0 top
FD57  FIDUCIALUFIDUCIAL  [FIDUCIAL-MICRO]  78.74,58.55 0 bottom
FD58  FIDUCIALUFIDUCIAL  [FIDUCIAL-MICRO]  59.31,47.24 0 bottom
FD59  FIDUCIALUFIDUCIAL  [FIDUCIAL-MICRO]  59.31,47.24 0 top
FD60  FIDUCIALUFIDUCIAL  [FIDUCIAL-MICRO]  78.74,58.55 0 top
FD61  FIDUCIALUFIDUCIAL  [FIDUCIAL-MICRO]  104.65,58.55 0 bottom
FD62  FIDUCIALUFIDUCIAL  [FIDUCIAL-MICRO]  85.22,47.24 0 bottom
FD63  FIDUCIALUFIDUCIAL  [FIDUCIAL-MICRO]  85.22,47.24 0 top
FD64  FIDUCIALUFIDUCIAL  [FIDUCIAL-MICRO]  104.65,58.55 0 top
FD65  FIDUCIALUFIDUCIAL  [FIDUCIAL-MICRO]  26.92,71.76 0 bottom
FD66  FIDUCIALUFIDUCIAL  [FIDUCIAL-MICRO]  7.49,60.45 0 bottom
FD67  FIDUCIALUFIDUCIAL  [FIDUCIAL-MICRO]  7.49,60.45 0 top
FD68  FIDUCIALUFIDUCIAL  [FIDUCIAL-MICRO]  26.92,71.76 0 top
FD69  FIDUCIALUFIDUCIAL  [FIDUCIAL-MICRO]  52.83,71.76 0 bottom
FD70  FIDUCIALUFIDUCIAL  [FIDUCIAL-MICRO]  33.4,60.45 0 bottom
FD71  FIDUCIALUFIDUCIAL  [FIDUCIAL-MICRO]  33.4,60.45 0 top
FD72  FIDUCIALUFIDUCIAL  [FIDUCIAL-MICRO]  52.83,71.76 0 top
FD73  FIDUCIALUFIDUCIAL  [FIDUCIAL-MICRO]  78.74,71.76 0 bottom
FD74  FIDUCIALUFIDUCIAL  [FIDUCIAL-MICRO]  59.31,60.45 0 bottom
FD75  FIDUCIALUFIDUCIAL  [FIDUCIAL-MICRO]  59.31,60.45 0 top
FD76  FIDUCIALUFIDUCIAL  [FIDUCIAL-MICRO]  78.74,71.76 0 top
FD77  FIDUCIALUFIDUCIAL  [FIDUCIAL-MICRO]  104.65,71.76 0 bottom
FD78  FIDUCIALUFIDUCIAL  [FIDUCIAL-MICRO]  85.22,60.45 0 bottom
FD79  FIDUCIALUFIDUCIAL  [FIDUCIAL-MICRO]  85.22,60.45 0 top
FD80  FIDUCIALUFIDUCIAL  [FIDUCIAL-MICRO]  104.65,71.76 0 top
FD81  FIDUCIALUFIDUCIAL  [FIDUCIAL-MICRO]  26.92,84.96 0 bottom
FD82  FIDUCIALUFIDUCIAL  [FIDUCIAL-MICRO]  7.49,73.66 0 bottom
FD83  FIDUCIALUFIDUCIAL  [FIDUCIAL-MICRO]  7.49,73.66 0 top
FD84  FIDUCIALUFIDUCIAL  [FIDUCIAL-MICRO]  26.92,84.96 0 top
FD85  FIDUCIALUFIDUCIAL  [FIDUCIAL-MICRO]  52.83,84.96 0 bottom
FD86  FIDUCIALUFIDUCIAL  [FIDUCIAL-MICRO]  33.4,73.66 0 bottom
FD87  FIDUCIALUFIDUCIAL  [FIDUCIAL-MICRO]  33.4,73.66 0 top
FD88  FIDUCIALUFIDUCIAL  [FIDUCIAL-MICRO]  52.83,84.96 0 top
FD89  FIDUCIALUFIDUCIAL  [FIDUCIAL-MICRO]  78.74,84.96 0 bottom
FD90  FIDUCIALUFIDUCIAL  [FIDUCIAL-MICRO]  59.31,73.66 0 bottom
FD91  FIDUCIALUFIDUCIAL  [FIDUCIAL-MICRO]  59.31,73.66 0 top
FD92  FIDUCIALUFIDUCIAL  [FIDUCIAL-MICRO]  78.74,84.96 0 top
FD93  FIDUCIALUFIDUCIAL  [FIDUCIAL-MICRO]  104.65,84.96 0 bottom
FD94  FIDUCIALUFIDUCIAL  [FIDUCIAL-MICRO]  85.22,73.66 0 bottom
FD95  FIDUCIALUFIDUCIAL  [FIDUCIAL-MICRO]  85.22,73.66 0 top
FD96  FIDUCIALUFIDUCIAL  [FIDUCIAL-MICRO]  104.65,84.96 0 top
FD97  FIDUCIALUFIDUCIAL  [FIDUCIAL-MICRO]  26.92,98.17 0 bottom
FD98  FIDUCIALUFIDUCIAL  [FIDUCIAL-MICRO]  7.49,86.87 0 bottom
FD99  FIDUCIALUFIDUCIAL  [FIDUCIAL-MICRO]  7.49,86.87 0 top
FD100  FIDUCIALUFIDUCIAL  [FIDUCIAL-MICRO]  26.92,98.17 0 top
FD101  FIDUCIALUFIDUCIAL  [FIDUCIAL-MICRO]  52.83,98.17 0 bottom
FD102  FIDUCIALUFIDUCIAL  [FIDUCIAL-MICRO]  33.4,86.87 0 bottom
FD103  FIDUCIALUFIDUCIAL  [FIDUCIAL-MICRO]  33.4,86.87 0 top
FD104  FIDUCIALUFIDUCIAL  [FIDUCIAL-MICRO]  52.83,98.17 0 top
FD105  FIDUCIALUFIDUCIAL  [FIDUCIAL-MICRO]  78.74,98.17 0 bottom
FD106  FIDUCIALUFIDUCIAL  [FIDUCIAL-MICRO]  59.31,86.87 0 bottom
FD107  FIDUCIALUFIDUCIAL  [FIDUCIAL-MICRO]  59.31,86.87 0 top
FD108  FIDUCIALUFIDUCIAL  [FIDUCIAL-MICRO]  78.74,98.17 0 top
FD109  FIDUCIALUFIDUCIAL  [FIDUCIAL-MICRO]  104.65,98.17 0 bottom
FD110  FIDUCIALUFIDUCIAL  [FIDUCIAL-MICRO]  85.22,86.87 0 bottom
FD111  FIDUCIALUFIDUCIAL  [FIDUCIAL-MICRO]  85.22,86.87 0 top
FD112  FIDUCIALUFIDUCIAL  [FIDUCIAL-MICRO]  104.65,98.17 0 top
FD113  FIDUCIALUFIDUCIAL  [FIDUCIAL-MICRO]  26.92,111.38 0 bottom
FD114  FIDUCIALUFIDUCIAL  [FIDUCIAL-MICRO]  7.49,100.08 0 bottom
FD115  FIDUCIALUFIDUCIAL  [FIDUCIAL-MICRO]  7.49,100.08 0 top
FD116  FIDUCIALUFIDUCIAL  [FIDUCIAL-MICRO]  26.92,111.38 0 top
FD117  FIDUCIALUFIDUCIAL  [FIDUCIAL-MICRO]  52.83,111.38 0 bottom
FD118  FIDUCIALUFIDUCIAL  [FIDUCIAL-MICRO]  33.4,100.08 0 bottom
FD119  FIDUCIALUFIDUCIAL  [FIDUCIAL-MICRO]  33.4,100.08 0 top
FD120  FIDUCIALUFIDUCIAL  [FIDUCIAL-MICRO]  52.83,111.38 0 top
FD121  FIDUCIALUFIDUCIAL  [FIDUCIAL-MICRO]  78.74,111.38 0 bottom
FD122  FIDUCIALUFIDUCIAL  [FIDUCIAL-MICRO]  59.31,100.08 0 bottom
FD123  FIDUCIALUFIDUCIAL  [FIDUCIAL-MICRO]  59.31,100.08 0 top
FD124  FIDUCIALUFIDUCIAL  [FIDUCIAL-MICRO]  78.74,111.38 0 top
FD125  FIDUCIALUFIDUCIAL  [FIDUCIAL-MICRO]  104.65,111.38 0 bottom
FD126  FIDUCIALUFIDUCIAL  [FIDUCIAL-MICRO]  85.22,100.08 0 bottom
FD127  FIDUCIALUFIDUCIAL  [FIDUCIAL-MICRO]  85.22,100.08 0 top
FD128  FIDUCIALUFIDUCIAL  [FIDUCIAL-MICRO]  104.65,111.38 0 top
FD129  FIDUCIALUFIDUCIAL  [FIDUCIAL-MICRO]  26.92,124.59 0 bottom
FD130  FIDUCIALUFIDUCIAL  [FIDUCIAL-MICRO]  7.49,113.28 0 bottom
FD131  FIDUCIALUFIDUCIAL  [FIDUCIAL-MICRO]  7.49,113.28 0 top
FD132  FIDUCIALUFIDUCIAL  [FIDUCIAL-MICRO]  26.92,124.59 0 top
FD133  FIDUCIALUFIDUCIAL  [FIDUCIAL-MICRO]  52.83,124.59 0 bottom
FD134  FIDUCIALUFIDUCIAL  [FIDUCIAL-MICRO]  33.4,113.28 0 bottom
FD135  FIDUCIALUFIDUCIAL  [FIDUCIAL-MICRO]  33.4,113.28 0 top
FD136  FIDUCIALUFIDUCIAL  [FIDUCIAL-MICRO]  52.83,124.59 0 top
FD137  FIDUCIALUFIDUCIAL  [FIDUCIAL-MICRO]  78.74,124.59 0 bottom
FD138  FIDUCIALUFIDUCIAL  [FIDUCIAL-MICRO]  59.31,113.28 0 bottom
FD139  FIDUCIALUFIDUCIAL  [FIDUCIAL-MICRO]  59.31,113.28 0 top
FD140  FIDUCIALUFIDUCIAL  [FIDUCIAL-MICRO]  78.74,124.59 0 top
FD141  FIDUCIALUFIDUCIAL  [FIDUCIAL-MICRO]  104.65,124.59 0 bottom
FD142  FIDUCIALUFIDUCIAL  [FIDUCIAL-MICRO]  85.22,113.28 0 bottom
FD143  FIDUCIALUFIDUCIAL  [FIDUCIAL-MICRO]  85.22,113.28 0 top
FD144  FIDUCIALUFIDUCIAL  [FIDUCIAL-MICRO]  104.65,124.59 0 top
FD145  FIDUCIALUFIDUCIAL  [FIDUCIAL-MICRO]  26.92,137.8 0 bottom
FD146  FIDUCIALUFIDUCIAL  [FIDUCIAL-MICRO]  7.49,126.49 0 bottom
FD147  FIDUCIALUFIDUCIAL  [FIDUCIAL-MICRO]  7.49,126.49 0 top
FD148  FIDUCIALUFIDUCIAL  [FIDUCIAL-MICRO]  26.92,137.8 0 top
FD149  FIDUCIALUFIDUCIAL  [FIDUCIAL-MICRO]  52.83,137.8 0 bottom
FD150  FIDUCIALUFIDUCIAL  [FIDUCIAL-MICRO]  33.4,126.49 0 bottom
FD151  FIDUCIALUFIDUCIAL  [FIDUCIAL-MICRO]  33.4,126.49 0 top
FD152  FIDUCIALUFIDUCIAL  [FIDUCIAL-MICRO]  52.83,137.8 0 top
FD153  FIDUCIALUFIDUCIAL  [FIDUCIAL-MICRO]  78.74,137.8 0 bottom
FD154  FIDUCIALUFIDUCIAL  [FIDUCIAL-MICRO]  59.31,126.49 0 bottom
FD155  FIDUCIALUFIDUCIAL  [FIDUCIAL-MICRO]  59.31,126.49 0 top
FD156  FIDUCIALUFIDUCIAL  [FIDUCIAL-MICRO]  78.74,137.8 0 top
FD157  FIDUCIALUFIDUCIAL  [FIDUCIAL-MICRO]  104.65,137.8 0 bottom
FD158  FIDUCIALUFIDUCIAL  [FIDUCIAL-MICRO]  85.22,126.49 0 bottom
FD159  FIDUCIALUFIDUCIAL  [FIDUCIAL-MICRO]  85.22,126.49 0 top
FD160  FIDUCIALUFIDUCIAL  [FIDUCIAL-MICRO]  104.65,137.8 0 top
FD161  FIDUCIALUFIDUCIAL  [FIDUCIAL-MICRO]  26.92,151 0 bottom
FD162  FIDUCIALUFIDUCIAL  [FIDUCIAL-MICRO]  7.49,139.7 0 bottom
FD163  FIDUCIALUFIDUCIAL  [FIDUCIAL-MICRO]  7.49,139.7 0 top
FD164  FIDUCIALUFIDUCIAL  [FIDUCIAL-MICRO]  26.92,151 0 top
FD165  FIDUCIALUFIDUCIAL  [FIDUCIAL-MICRO]  52.83,151 0 bottom
FD166  FIDUCIALUFIDUCIAL  [FIDUCIAL-MICRO]  33.4,139.7 0 bottom
FD167  FIDUCIALUFIDUCIAL  [FIDUCIAL-MICRO]  33.4,139.7 0 top
FD168  FIDUCIALUFIDUCIAL  [FIDUCIAL-MICRO]  52.83,151 0 top
FD169  FIDUCIALUFIDUCIAL  [FIDUCIAL-MICRO]  78.74,151 0 bottom
FD170  FIDUCIALUFIDUCIAL  [FIDUCIAL-MICRO]  59.31,139.7 0 bottom
FD171  FIDUCIALUFIDUCIAL  [FIDUCIAL-MICRO]  59.31,139.7 0 top
FD172  FIDUCIALUFIDUCIAL  [FIDUCIAL-MICRO]  78.74,151 0 top
FD173  FIDUCIALUFIDUCIAL  [FIDUCIAL-MICRO]  104.65,151 0 bottom
FD174  FIDUCIALUFIDUCIAL  [FIDUCIAL-MICRO]  85.22,139.7 0 bottom
FD175  FIDUCIALUFIDUCIAL  [FIDUCIAL-MICRO]  85.22,139.7 0 top
FD176  FIDUCIALUFIDUCIAL  [FIDUCIAL-MICRO]  104.65,151 0 top
FD177  FIDUCIALUFIDUCIAL  [FIDUCIAL-MICRO]  26.92,164.21 0 bottom
FD178  FIDUCIALUFIDUCIAL  [FIDUCIAL-MICRO]  7.49,152.91 0 bottom
FD179  FIDUCIALUFIDUCIAL  [FIDUCIAL-MICRO]  7.49,152.91 0 top
FD180  FIDUCIALUFIDUCIAL  [FIDUCIAL-MICRO]  26.92,164.21 0 top
FD181  FIDUCIALUFIDUCIAL  [FIDUCIAL-MICRO]  52.83,164.21 0 bottom
FD182  FIDUCIALUFIDUCIAL  [FIDUCIAL-MICRO]  33.4,152.91 0 bottom
FD183  FIDUCIALUFIDUCIAL  [FIDUCIAL-MICRO]  33.4,152.91 0 top
FD184  FIDUCIALUFIDUCIAL  [FIDUCIAL-MICRO]  52.83,164.21 0 top
FD185  FIDUCIALUFIDUCIAL  [FIDUCIAL-MICRO]  78.74,164.21 0 bottom
FD186  FIDUCIALUFIDUCIAL  [FIDUCIAL-MICRO]  59.31,152.91 0 bottom
FD187  FIDUCIALUFIDUCIAL  [FIDUCIAL-MICRO]  59.31,152.91 0 top
FD188  FIDUCIALUFIDUCIAL  [FIDUCIAL-MICRO]  78.74,164.21 0 top
FD189  FIDUCIALUFIDUCIAL  [FIDUCIAL-MICRO]  104.65,164.21 0 bottom
FD190  FIDUCIALUFIDUCIAL  [FIDUCIAL-MICRO]  85.22,152.91 0 bottom
FD191  FIDUCIALUFIDUCIAL  [FIDUCIAL-MICRO]  85.22,152.91 0 top
FD192  FIDUCIALUFIDUCIAL  [FIDUCIAL-MICRO]  104.65,164.21 0 top
FRAME1  FRAME-LETTER  [CREATIVE_COMMONS]  18.29,-9.91 0 top  (outside the outline)
FRAME2  FRAME-LETTER  [CREATIVE_COMMONS]  -7.62,-9.91 0 top  (outside the outline)
FRAME3  FRAME-LETTER  [CREATIVE_COMMONS]  44.2,-9.91 0 top  (outside the outline)
FRAME4  FRAME-LETTER  [CREATIVE_COMMONS]  70.1,-9.91 0 top  (outside the outline)
FRAME5  FRAME-LETTER  [CREATIVE_COMMONS]  -7.62,3.3 0 top  (outside the outline)
FRAME6  FRAME-LETTER  [CREATIVE_COMMONS]  18.29,3.3 0 top
FRAME7  FRAME-LETTER  [CREATIVE_COMMONS]  44.2,3.3 0 top
FRAME8  FRAME-LETTER  [CREATIVE_COMMONS]  70.1,3.3 0 top
FRAME9  FRAME-LETTER  [CREATIVE_COMMONS]  -7.62,16.51 0 top  (outside the outline)
FRAME10  FRAME-LETTER  [CREATIVE_COMMONS]  18.29,16.51 0 top
FRAME11  FRAME-LETTER  [CREATIVE_COMMONS]  44.2,16.51 0 top
FRAME12  FRAME-LETTER  [CREATIVE_COMMONS]  70.1,16.51 0 top
FRAME13  FRAME-LETTER  [CREATIVE_COMMONS]  -7.62,29.72 0 top  (outside the outline)
FRAME14  FRAME-LETTER  [CREATIVE_COMMONS]  18.29,29.72 0 top
FRAME15  FRAME-LETTER  [CREATIVE_COMMONS]  44.2,29.72 0 top
FRAME16  FRAME-LETTER  [CREATIVE_COMMONS]  70.1,29.72 0 top
FRAME17  FRAME-LETTER  [CREATIVE_COMMONS]  -7.62,42.93 0 top  (outside the outline)
FRAME18  FRAME-LETTER  [CREATIVE_COMMONS]  18.29,42.93 0 top
FRAME19  FRAME-LETTER  [CREATIVE_COMMONS]  44.2,42.93 0 top
FRAME20  FRAME-LETTER  [CREATIVE_COMMONS]  70.1,42.93 0 top
FRAME21  FRAME-LETTER  [CREATIVE_COMMONS]  -7.62,56.13 0 top  (outside the outline)
FRAME22  FRAME-LETTER  [CREATIVE_COMMONS]  18.29,56.13 0 top
FRAME23  FRAME-LETTER  [CREATIVE_COMMONS]  44.2,56.13 0 top
FRAME24  FRAME-LETTER  [CREATIVE_COMMONS]  70.1,56.13 0 top
FRAME25  FRAME-LETTER  [CREATIVE_COMMONS]  -7.62,69.34 0 top  (outside the outline)
FRAME26  FRAME-LETTER  [CREATIVE_COMMONS]  18.29,69.34 0 top
FRAME27  FRAME-LETTER  [CREATIVE_COMMONS]  44.2,69.34 0 top
FRAME28  FRAME-LETTER  [CREATIVE_COMMONS]  70.1,69.34 0 top
FRAME29  FRAME-LETTER  [CREATIVE_COMMONS]  -7.62,82.55 0 top  (outside the outline)
FRAME30  FRAME-LETTER  [CREATIVE_COMMONS]  18.29,82.55 0 top
FRAME31  FRAME-LETTER  [CREATIVE_COMMONS]  44.2,82.55 0 top
FRAME32  FRAME-LETTER  [CREATIVE_COMMONS]  70.1,82.55 0 top
FRAME33  FRAME-LETTER  [CREATIVE_COMMONS]  -7.62,95.76 0 top  (outside the outline)
FRAME34  FRAME-LETTER  [CREATIVE_COMMONS]  18.29,95.76 0 top
FRAME35  FRAME-LETTER  [CREATIVE_COMMONS]  44.2,95.76 0 top
FRAME36  FRAME-LETTER  [CREATIVE_COMMONS]  70.1,95.76 0 top
FRAME37  FRAME-LETTER  [CREATIVE_COMMONS]  -7.62,108.97 0 top  (outside the outline)
FRAME38  FRAME-LETTER  [CREATIVE_COMMONS]  18.29,108.97 0 top
FRAME39  FRAME-LETTER  [CREATIVE_COMMONS]  44.2,108.97 0 top
FRAME40  FRAME-LETTER  [CREATIVE_COMMONS]  70.1,108.97 0 top
FRAME41  FRAME-LETTER  [CREATIVE_COMMONS]  -7.62,122.17 0 top  (outside the outline)
FRAME42  FRAME-LETTER  [CREATIVE_COMMONS]  18.29,122.17 0 top
FRAME43  FRAME-LETTER  [CREATIVE_COMMONS]  44.2,122.17 0 top
FRAME44  FRAME-LETTER  [CREATIVE_COMMONS]  70.1,122.17 0 top
FRAME45  FRAME-LETTER  [CREATIVE_COMMONS]  -7.62,135.38 0 top  (outside the outline)
FRAME46  FRAME-LETTER  [CREATIVE_COMMONS]  18.29,135.38 0 top
FRAME47  FRAME-LETTER  [CREATIVE_COMMONS]  44.2,135.38 0 top
FRAME48  FRAME-LETTER  [CREATIVE_COMMONS]  70.1,135.38 0 top
H1  STAND-OFFTIGHT  [STAND-OFF-TIGHT]  55.63,9.4 0 top
H2  STAND-OFFTIGHT  [STAND-OFF-TIGHT]  35.31,9.4 0 top
H3  STAND-OFFTIGHT  [STAND-OFF-TIGHT]  81.53,9.4 0 top
H4  STAND-OFFTIGHT  [STAND-OFF-TIGHT]  61.21,9.4 0 top
H5  STAND-OFFTIGHT  [STAND-OFF-TIGHT]  107.44,9.4 0 top
H6  STAND-OFFTIGHT  [STAND-OFF-TIGHT]  87.12,9.4 0 top
H7  STAND-OFFTIGHT  [STAND-OFF-TIGHT]  29.72,9.4 0 top
H8  STAND-OFFTIGHT  [STAND-OFF-TIGHT]  9.4,9.4 0 top
H9  STAND-OFFTIGHT  [STAND-OFF-TIGHT]  29.72,22.61 0 top
H10  STAND-OFFTIGHT  [STAND-OFF-TIGHT]  9.4,22.61 0 top
H11  STAND-OFFTIGHT  [STAND-OFF-TIGHT]  55.63,22.61 0 top
H12  STAND-OFFTIGHT  [STAND-OFF-TIGHT]  35.31,22.61 0 top
H13  STAND-OFFTIGHT  [STAND-OFF-TIGHT]  81.53,22.61 0 top
H14  STAND-OFFTIGHT  [STAND-OFF-TIGHT]  61.21,22.61 0 top
H15  STAND-OFFTIGHT  [STAND-OFF-TIGHT]  107.44,22.61 0 top
H16  STAND-OFFTIGHT  [STAND-OFF-TIGHT]  87.12,22.61 0 top
H17  STAND-OFFTIGHT  [STAND-OFF-TIGHT]  29.72,35.81 0 top
H18  STAND-OFFTIGHT  [STAND-OFF-TIGHT]  9.4,35.81 0 top
H19  STAND-OFFTIGHT  [STAND-OFF-TIGHT]  55.63,35.81 0 top
H20  STAND-OFFTIGHT  [STAND-OFF-TIGHT]  35.31,35.81 0 top
H21  STAND-OFFTIGHT  [STAND-OFF-TIGHT]  81.53,35.81 0 top
H22  STAND-OFFTIGHT  [STAND-OFF-TIGHT]  61.21,35.81 0 top
H23  STAND-OFFTIGHT  [STAND-OFF-TIGHT]  107.44,35.81 0 top
H24  STAND-OFFTIGHT  [STAND-OFF-TIGHT]  87.12,35.81 0 top
H25  STAND-OFFTIGHT  [STAND-OFF-TIGHT]  29.72,49.02 0 top
H26  STAND-OFFTIGHT  [STAND-OFF-TIGHT]  9.4,49.02 0 top
H27  STAND-OFFTIGHT  [STAND-OFF-TIGHT]  55.63,49.02 0 top
H28  STAND-OFFTIGHT  [STAND-OFF-TIGHT]  35.31,49.02 0 top
H29  STAND-OFFTIGHT  [STAND-OFF-TIGHT]  81.53,49.02 0 top
H30  STAND-OFFTIGHT  [STAND-OFF-TIGHT]  61.21,49.02 0 top
H31  STAND-OFFTIGHT  [STAND-OFF-TIGHT]  107.44,49.02 0 top
H32  STAND-OFFTIGHT  [STAND-OFF-TIGHT]  87.12,49.02 0 top
H33  STAND-OFFTIGHT  [STAND-OFF-TIGHT]  29.72,62.23 0 top
H34  STAND-OFFTIGHT  [STAND-OFF-TIGHT]  9.4,62.23 0 top
H35  STAND-OFFTIGHT  [STAND-OFF-TIGHT]  55.63,62.23 0 top
H36  STAND-OFFTIGHT  [STAND-OFF-TIGHT]  35.31,62.23 0 top
H37  STAND-OFFTIGHT  [STAND-OFF-TIGHT]  81.53,62.23 0 top
H38  STAND-OFFTIGHT  [STAND-OFF-TIGHT]  61.21,62.23 0 top
H39  STAND-OFFTIGHT  [STAND-OFF-TIGHT]  107.44,62.23 0 top
H40  STAND-OFFTIGHT  [STAND-OFF-TIGHT]  87.12,62.23 0 top
H41  STAND-OFFTIGHT  [STAND-OFF-TIGHT]  29.72,75.44 0 top
H42  STAND-OFFTIGHT  [STAND-OFF-TIGHT]  9.4,75.44 0 top
H43  STAND-OFFTIGHT  [STAND-OFF-TIGHT]  55.63,75.44 0 top
H44  STAND-OFFTIGHT  [STAND-OFF-TIGHT]  35.31,75.44 0 top
H45  STAND-OFFTIGHT  [STAND-OFF-TIGHT]  81.53,75.44 0 top
H46  STAND-OFFTIGHT  [STAND-OFF-TIGHT]  61.21,75.44 0 top
H47  STAND-OFFTIGHT  [STAND-OFF-TIGHT]  107.44,75.44 0 top
H48  STAND-OFFTIGHT  [STAND-OFF-TIGHT]  87.12,75.44 0 top
H49  STAND-OFFTIGHT  [STAND-OFF-TIGHT]  29.72,88.65 0 top
H50  STAND-OFFTIGHT  [STAND-OFF-TIGHT]  9.4,88.65 0 top
H51  STAND-OFFTIGHT  [STAND-OFF-TIGHT]  55.63,88.65 0 top
H52  STAND-OFFTIGHT  [STAND-OFF-TIGHT]  35.31,88.65 0 top
H53  STAND-OFFTIGHT  [STAND-OFF-TIGHT]  81.53,88.65 0 top
H54  STAND-OFFTIGHT  [STAND-OFF-TIGHT]  61.21,88.65 0 top
H55  STAND-OFFTIGHT  [STAND-OFF-TIGHT]  107.44,88.65 0 top
H56  STAND-OFFTIGHT  [STAND-OFF-TIGHT]  87.12,88.65 0 top
H57  STAND-OFFTIGHT  [STAND-OFF-TIGHT]  29.72,101.85 0 top
H58  STAND-OFFTIGHT  [STAND-OFF-TIGHT]  9.4,101.85 0 top
H59  STAND-OFFTIGHT  [STAND-OFF-TIGHT]  55.63,101.85 0 top
H60  STAND-OFFTIGHT  [STAND-OFF-TIGHT]  35.31,101.85 0 top
H61  STAND-OFFTIGHT  [STAND-OFF-TIGHT]  81.53,101.85 0 top
H62  STAND-OFFTIGHT  [STAND-OFF-TIGHT]  61.21,101.85 0 top
H63  STAND-OFFTIGHT  [STAND-OFF-TIGHT]  107.44,101.85 0 top
H64  STAND-OFFTIGHT  [STAND-OFF-TIGHT]  87.12,101.85 0 top
H65  STAND-OFFTIGHT  [STAND-OFF-TIGHT]  29.72,115.06 0 top
H66  STAND-OFFTIGHT  [STAND-OFF-TIGHT]  9.4,115.06 0 top
H67  STAND-OFFTIGHT  [STAND-OFF-TIGHT]  55.63,115.06 0 top
H68  STAND-OFFTIGHT  [STAND-OFF-TIGHT]  35.31,115.06 0 top
H69  STAND-OFFTIGHT  [STAND-OFF-TIGHT]  81.53,115.06 0 top
H70  STAND-OFFTIGHT  [STAND-OFF-TIGHT]  61.21,115.06 0 top
H71  STAND-OFFTIGHT  [STAND-OFF-TIGHT]  107.44,115.06 0 top
H72  STAND-OFFTIGHT  [STAND-OFF-TIGHT]  87.12,115.06 0 top
H73  STAND-OFFTIGHT  [STAND-OFF-TIGHT]  29.72,128.27 0 top
H74  STAND-OFFTIGHT  [STAND-OFF-TIGHT]  9.4,128.27 0 top
H75  STAND-OFFTIGHT  [STAND-OFF-TIGHT]  55.63,128.27 0 top
H76  STAND-OFFTIGHT  [STAND-OFF-TIGHT]  35.31,128.27 0 top
H77  STAND-OFFTIGHT  [STAND-OFF-TIGHT]  81.53,128.27 0 top
H78  STAND-OFFTIGHT  [STAND-OFF-TIGHT]  61.21,128.27 0 top
H79  STAND-OFFTIGHT  [STAND-OFF-TIGHT]  107.44,128.27 0 top
H80  STAND-OFFTIGHT  [STAND-OFF-TIGHT]  87.12,128.27 0 top
H81  STAND-OFFTIGHT  [STAND-OFF-TIGHT]  29.72,141.48 0 top
H82  STAND-OFFTIGHT  [STAND-OFF-TIGHT]  9.4,141.48 0 top
H83  STAND-OFFTIGHT  [STAND-OFF-TIGHT]  55.63,141.48 0 top
H84  STAND-OFFTIGHT  [STAND-OFF-TIGHT]  35.31,141.48 0 top
H85  STAND-OFFTIGHT  [STAND-OFF-TIGHT]  81.53,141.48 0 top
H86  STAND-OFFTIGHT  [STAND-OFF-TIGHT]  61.21,141.48 0 top
H87  STAND-OFFTIGHT  [STAND-OFF-TIGHT]  107.44,141.48 0 top
H88  STAND-OFFTIGHT  [STAND-OFF-TIGHT]  87.12,141.48 0 top
H89  STAND-OFFTIGHT  [STAND-OFF-TIGHT]  29.72,154.69 0 top
H90  STAND-OFFTIGHT  [STAND-OFF-TIGHT]  9.4,154.69 0 top
H91  STAND-OFFTIGHT  [STAND-OFF-TIGHT]  55.63,154.69 0 top
H92  STAND-OFFTIGHT  [STAND-OFF-TIGHT]  35.31,154.69 0 top
H93  STAND-OFFTIGHT  [STAND-OFF-TIGHT]  81.53,154.69 0 top
H94  STAND-OFFTIGHT  [STAND-OFF-TIGHT]  61.21,154.69 0 top
H95  STAND-OFFTIGHT  [STAND-OFF-TIGHT]  107.44,154.69 0 top
H96  STAND-OFFTIGHT  [STAND-OFF-TIGHT]  87.12,154.69 0 top
I2C_PU  S_MODE  [SMT-JUMPER_3_2-NC_TRACE_SILK]  27.18,14.48 0 bottom
I2C_PU1  S_MODE  [SMT-JUMPER_3_2-NC_TRACE_SILK]  53.09,14.48 0 bottom
I2C_PU2  S_MODE  [SMT-JUMPER_3_2-NC_TRACE_SILK]  78.99,14.48 0 bottom
I2C_PU3  S_MODE  [SMT-JUMPER_3_2-NC_TRACE_SILK]  104.9,14.48 0 bottom
I2C_PU4  S_MODE  [SMT-JUMPER_3_2-NC_TRACE_SILK]  27.18,27.69 0 bottom
I2C_PU5  S_MODE  [SMT-JUMPER_3_2-NC_TRACE_SILK]  53.09,27.69 0 bottom
I2C_PU6  S_MODE  [SMT-JUMPER_3_2-NC_TRACE_SILK]  78.99,27.69 0 bottom
I2C_PU7  S_MODE  [SMT-JUMPER_3_2-NC_TRACE_SILK]  104.9,27.69 0 bottom
I2C_PU8  S_MODE  [SMT-JUMPER_3_2-NC_TRACE_SILK]  27.18,40.89 0 bottom
I2C_PU9  S_MODE  [SMT-JUMPER_3_2-NC_TRACE_SILK]  53.09,40.89 0 bottom
I2C_PU10  S_MODE  [SMT-JUMPER_3_2-NC_TRACE_SILK]  78.99,40.89 0 bottom
I2C_PU11  S_MODE  [SMT-JUMPER_3_2-NC_TRACE_SILK]  104.9,40.89 0 bottom
I2C_PU12  S_MODE  [SMT-JUMPER_3_2-NC_TRACE_SILK]  27.18,54.1 0 bottom
I2C_PU13  S_MODE  [SMT-JUMPER_3_2-NC_TRACE_SILK]  53.09,54.1 0 bottom
I2C_PU14  S_MODE  [SMT-JUMPER_3_2-NC_TRACE_SILK]  78.99,54.1 0 bottom
I2C_PU15  S_MODE  [SMT-JUMPER_3_2-NC_TRACE_SILK]  104.9,54.1 0 bottom
I2C_PU16  S_MODE  [SMT-JUMPER_3_2-NC_TRACE_SILK]  27.18,67.31 0 bottom
I2C_PU17  S_MODE  [SMT-JUMPER_3_2-NC_TRACE_SILK]  53.09,67.31 0 bottom
I2C_PU18  S_MODE  [SMT-JUMPER_3_2-NC_TRACE_SILK]  78.99,67.31 0 bottom
I2C_PU19  S_MODE  [SMT-JUMPER_3_2-NC_TRACE_SILK]  104.9,67.31 0 bottom
I2C_PU20  S_MODE  [SMT-JUMPER_3_2-NC_TRACE_SILK]  27.18,80.52 0 bottom
I2C_PU21  S_MODE  [SMT-JUMPER_3_2-NC_TRACE_SILK]  53.09,80.52 0 bottom
I2C_PU22  S_MODE  [SMT-JUMPER_3_2-NC_TRACE_SILK]  78.99,80.52 0 bottom
I2C_PU23  S_MODE  [SMT-JUMPER_3_2-NC_TRACE_SILK]  104.9,80.52 0 bottom
I2C_PU24  S_MODE  [SMT-JUMPER_3_2-NC_TRACE_SILK]  27.18,93.73 0 bottom
I2C_PU25  S_MODE  [SMT-JUMPER_3_2-NC_TRACE_SILK]  53.09,93.73 0 bottom
I2C_PU26  S_MODE  [SMT-JUMPER_3_2-NC_TRACE_SILK]  78.99,93.73 0 bottom
I2C_PU27  S_MODE  [SMT-JUMPER_3_2-NC_TRACE_SILK]  104.9,93.73 0 bottom
I2C_PU28  S_MODE  [SMT-JUMPER_3_2-NC_TRACE_SILK]  27.18,106.93 0 bottom
I2C_PU29  S_MODE  [SMT-JUMPER_3_2-NC_TRACE_SILK]  53.09,106.93 0 bottom
I2C_PU30  S_MODE  [SMT-JUMPER_3_2-NC_TRACE_SILK]  78.99,106.93 0 bottom
I2C_PU31  S_MODE  [SMT-JUMPER_3_2-NC_TRACE_SILK]  104.9,106.93 0 bottom
I2C_PU32  S_MODE  [SMT-JUMPER_3_2-NC_TRACE_SILK]  27.18,120.14 0 bottom
I2C_PU33  S_MODE  [SMT-JUMPER_3_2-NC_TRACE_SILK]  53.09,120.14 0 bottom
I2C_PU34  S_MODE  [SMT-JUMPER_3_2-NC_TRACE_SILK]  78.99,120.14 0 bottom
I2C_PU35  S_MODE  [SMT-JUMPER_3_2-NC_TRACE_SILK]  104.9,120.14 0 bottom
I2C_PU36  S_MODE  [SMT-JUMPER_3_2-NC_TRACE_SILK]  27.18,133.35 0 bottom
I2C_PU37  S_MODE  [SMT-JUMPER_3_2-NC_TRACE_SILK]  53.09,133.35 0 bottom
I2C_PU38  S_MODE  [SMT-JUMPER_3_2-NC_TRACE_SILK]  78.99,133.35 0 bottom
I2C_PU39  S_MODE  [SMT-JUMPER_3_2-NC_TRACE_SILK]  104.9,133.35 0 bottom
I2C_PU40  S_MODE  [SMT-JUMPER_3_2-NC_TRACE_SILK]  27.18,146.56 0 bottom
I2C_PU41  S_MODE  [SMT-JUMPER_3_2-NC_TRACE_SILK]  53.09,146.56 0 bottom
I2C_PU42  S_MODE  [SMT-JUMPER_3_2-NC_TRACE_SILK]  78.99,146.56 0 bottom
I2C_PU43  S_MODE  [SMT-JUMPER_3_2-NC_TRACE_SILK]  104.9,146.56 0 bottom
I2C_PU44  S_MODE  [SMT-JUMPER_3_2-NC_TRACE_SILK]  27.18,159.77 0 bottom
I2C_PU45  S_MODE  [SMT-JUMPER_3_2-NC_TRACE_SILK]  53.09,159.77 0 bottom
I2C_PU46  S_MODE  [SMT-JUMPER_3_2-NC_TRACE_SILK]  78.99,159.77 0 bottom
I2C_PU47  S_MODE  [SMT-JUMPER_3_2-NC_TRACE_SILK]  104.9,159.77 0 bottom
J1  [1X05_NO_SILK]  14.48,8.13 0 top
J2  QWIIC_RIGHT_ANGLE  [JST04_1MM_RA]  53.09,15.75 90 top
J3  QWIIC_RIGHT_ANGLE  [JST04_1MM_RA]  37.85,15.75 270 top
J4  QWIIC_RIGHT_ANGLE  [JST04_1MM_RA]  27.18,15.75 90 top
J5  QWIIC_RIGHT_ANGLE  [JST04_1MM_RA]  11.94,15.75 270 top
J6  [1X05_NO_SILK]  40.39,8.13 0 top
J7  QWIIC_RIGHT_ANGLE  [JST04_1MM_RA]  78.99,15.75 90 top
J8  QWIIC_RIGHT_ANGLE  [JST04_1MM_RA]  63.75,15.75 270 top
J9  [1X05_NO_SILK]  66.29,8.13 0 top
J10  QWIIC_RIGHT_ANGLE  [JST04_1MM_RA]  104.9,15.75 90 top
J11  QWIIC_RIGHT_ANGLE  [JST04_1MM_RA]  89.66,15.75 270 top
J12  [1X05_NO_SILK]  92.2,8.13 0 top
J13  QWIIC_RIGHT_ANGLE  [JST04_1MM_RA]  27.18,28.96 90 top
J14  QWIIC_RIGHT_ANGLE  [JST04_1MM_RA]  11.94,28.96 270 top
J15  [1X05_NO_SILK]  14.48,21.34 0 top
J16  QWIIC_RIGHT_ANGLE  [JST04_1MM_RA]  53.09,28.96 90 top
J17  QWIIC_RIGHT_ANGLE  [JST04_1MM_RA]  37.85,28.96 270 top
J18  [1X05_NO_SILK]  40.39,21.34 0 top
J19  QWIIC_RIGHT_ANGLE  [JST04_1MM_RA]  78.99,28.96 90 top
J20  QWIIC_RIGHT_ANGLE  [JST04_1MM_RA]  63.75,28.96 270 top
J21  [1X05_NO_SILK]  66.29,21.34 0 top
J22  QWIIC_RIGHT_ANGLE  [JST04_1MM_RA]  104.9,28.96 90 top
J23  QWIIC_RIGHT_ANGLE  [JST04_1MM_RA]  89.66,28.96 270 top
J24  [1X05_NO_SILK]  92.2,21.34 0 top
J25  QWIIC_RIGHT_ANGLE  [JST04_1MM_RA]  27.18,42.16 90 top
J26  QWIIC_RIGHT_ANGLE  [JST04_1MM_RA]  11.94,42.16 270 top
J27  [1X05_NO_SILK]  14.48,34.54 0 top
J28  QWIIC_RIGHT_ANGLE  [JST04_1MM_RA]  53.09,42.16 90 top
J29  QWIIC_RIGHT_ANGLE  [JST04_1MM_RA]  37.85,42.16 270 top
J30  [1X05_NO_SILK]  40.39,34.54 0 top
J31  QWIIC_RIGHT_ANGLE  [JST04_1MM_RA]  78.99,42.16 90 top
J32  QWIIC_RIGHT_ANGLE  [JST04_1MM_RA]  63.75,42.16 270 top
J33  [1X05_NO_SILK]  66.29,34.54 0 top
J34  QWIIC_RIGHT_ANGLE  [JST04_1MM_RA]  104.9,42.16 90 top
J35  QWIIC_RIGHT_ANGLE  [JST04_1MM_RA]  89.66,42.16 270 top
J36  [1X05_NO_SILK]  92.2,34.54 0 top
J37  QWIIC_RIGHT_ANGLE  [JST04_1MM_RA]  27.18,55.37 90 top
J38  QWIIC_RIGHT_ANGLE  [JST04_1MM_RA]  11.94,55.37 270 top
J39  [1X05_NO_SILK]  14.48,47.75 0 top
J40  QWIIC_RIGHT_ANGLE  [JST04_1MM_RA]  53.09,55.37 90 top
J41  QWIIC_RIGHT_ANGLE  [JST04_1MM_RA]  37.85,55.37 270 top
J42  [1X05_NO_SILK]  40.39,47.75 0 top
J43  QWIIC_RIGHT_ANGLE  [JST04_1MM_RA]  78.99,55.37 90 top
J44  QWIIC_RIGHT_ANGLE  [JST04_1MM_RA]  63.75,55.37 270 top
J45  [1X05_NO_SILK]  66.29,47.75 0 top
J46  QWIIC_RIGHT_ANGLE  [JST04_1MM_RA]  104.9,55.37 90 top
J47  QWIIC_RIGHT_ANGLE  [JST04_1MM_RA]  89.66,55.37 270 top
J48  [1X05_NO_SILK]  92.2,47.75 0 top
J49  QWIIC_RIGHT_ANGLE  [JST04_1MM_RA]  27.18,68.58 90 top
J50  QWIIC_RIGHT_ANGLE  [JST04_1MM_RA]  11.94,68.58 270 top
J51  [1X05_NO_SILK]  14.48,60.96 0 top
J52  QWIIC_RIGHT_ANGLE  [JST04_1MM_RA]  53.09,68.58 90 top
J53  QWIIC_RIGHT_ANGLE  [JST04_1MM_RA]  37.85,68.58 270 top
J54  [1X05_NO_SILK]  40.39,60.96 0 top
J55  QWIIC_RIGHT_ANGLE  [JST04_1MM_RA]  78.99,68.58 90 top
J56  QWIIC_RIGHT_ANGLE  [JST04_1MM_RA]  63.75,68.58 270 top
J57  [1X05_NO_SILK]  66.29,60.96 0 top
J58  QWIIC_RIGHT_ANGLE  [JST04_1MM_RA]  104.9,68.58 90 top
J59  QWIIC_RIGHT_ANGLE  [JST04_1MM_RA]  89.66,68.58 270 top
J60  [1X05_NO_SILK]  92.2,60.96 0 top
J61  QWIIC_RIGHT_ANGLE  [JST04_1MM_RA]  27.18,81.79 90 top
J62  QWIIC_RIGHT_ANGLE  [JST04_1MM_RA]  11.94,81.79 270 top
J63  [1X05_NO_SILK]  14.48,74.17 0 top
J64  QWIIC_RIGHT_ANGLE  [JST04_1MM_RA]  53.09,81.79 90 top
J65  QWIIC_RIGHT_ANGLE  [JST04_1MM_RA]  37.85,81.79 270 top
J66  [1X05_NO_SILK]  40.39,74.17 0 top
J67  QWIIC_RIGHT_ANGLE  [JST04_1MM_RA]  78.99,81.79 90 top
J68  QWIIC_RIGHT_ANGLE  [JST04_1MM_RA]  63.75,81.79 270 top
J69  [1X05_NO_SILK]  66.29,74.17 0 top
J70  QWIIC_RIGHT_ANGLE  [JST04_1MM_RA]  104.9,81.79 90 top
J71  QWIIC_RIGHT_ANGLE  [JST04_1MM_RA]  89.66,81.79 270 top
J72  [1X05_NO_SILK]  92.2,74.17 0 top
J73  QWIIC_RIGHT_ANGLE  [JST04_1MM_RA]  27.18,95 90 top
J74  QWIIC_RIGHT_ANGLE  [JST04_1MM_RA]  11.94,95 270 top
J75  [1X05_NO_SILK]  14.48,87.38 0 top
J76  QWIIC_RIGHT_ANGLE  [JST04_1MM_RA]  53.09,95 90 top
J77  QWIIC_RIGHT_ANGLE  [JST04_1MM_RA]  37.85,95 270 top
J78  [1X05_NO_SILK]  40.39,87.38 0 top
J79  QWIIC_RIGHT_ANGLE  [JST04_1MM_RA]  78.99,95 90 top
J80  QWIIC_RIGHT_ANGLE  [JST04_1MM_RA]  63.75,95 270 top
J81  [1X05_NO_SILK]  66.29,87.38 0 top
J82  QWIIC_RIGHT_ANGLE  [JST04_1MM_RA]  104.9,95 90 top
J83  QWIIC_RIGHT_ANGLE  [JST04_1MM_RA]  89.66,95 270 top
J84  [1X05_NO_SILK]  92.2,87.38 0 top
J85  QWIIC_RIGHT_ANGLE  [JST04_1MM_RA]  27.18,108.2 90 top
J86  QWIIC_RIGHT_ANGLE  [JST04_1MM_RA]  11.94,108.2 270 top
J87  [1X05_NO_SILK]  14.48,100.58 0 top
J88  QWIIC_RIGHT_ANGLE  [JST04_1MM_RA]  53.09,108.2 90 top
J89  QWIIC_RIGHT_ANGLE  [JST04_1MM_RA]  37.85,108.2 270 top
J90  [1X05_NO_SILK]  40.39,100.58 0 top
J91  QWIIC_RIGHT_ANGLE  [JST04_1MM_RA]  78.99,108.2 90 top
J92  QWIIC_RIGHT_ANGLE  [JST04_1MM_RA]  63.75,108.2 270 top
J93  [1X05_NO_SILK]  66.29,100.58 0 top
J94  QWIIC_RIGHT_ANGLE  [JST04_1MM_RA]  104.9,108.2 90 top
J95  QWIIC_RIGHT_ANGLE  [JST04_1MM_RA]  89.66,108.2 270 top
J96  [1X05_NO_SILK]  92.2,100.58 0 top
J97  QWIIC_RIGHT_ANGLE  [JST04_1MM_RA]  27.18,121.41 90 top
J98  QWIIC_RIGHT_ANGLE  [JST04_1MM_RA]  11.94,121.41 270 top
J99  [1X05_NO_SILK]  14.48,113.79 0 top
J100  QWIIC_RIGHT_ANGLE  [JST04_1MM_RA]  53.09,121.41 90 top
J101  QWIIC_RIGHT_ANGLE  [JST04_1MM_RA]  37.85,121.41 270 top
J102  [1X05_NO_SILK]  40.39,113.79 0 top
J103  QWIIC_RIGHT_ANGLE  [JST04_1MM_RA]  78.99,121.41 90 top
J104  QWIIC_RIGHT_ANGLE  [JST04_1MM_RA]  63.75,121.41 270 top
J105  [1X05_NO_SILK]  66.29,113.79 0 top
J106  QWIIC_RIGHT_ANGLE  [JST04_1MM_RA]  104.9,121.41 90 top
J107  QWIIC_RIGHT_ANGLE  [JST04_1MM_RA]  89.66,121.41 270 top
J108  [1X05_NO_SILK]  92.2,113.79 0 top
J109  QWIIC_RIGHT_ANGLE  [JST04_1MM_RA]  27.18,134.62 90 top
J110  QWIIC_RIGHT_ANGLE  [JST04_1MM_RA]  11.94,134.62 270 top
J111  [1X05_NO_SILK]  14.48,127 0 top
J112  QWIIC_RIGHT_ANGLE  [JST04_1MM_RA]  53.09,134.62 90 top
J113  QWIIC_RIGHT_ANGLE  [JST04_1MM_RA]  37.85,134.62 270 top
J114  [1X05_NO_SILK]  40.39,127 0 top
J115  QWIIC_RIGHT_ANGLE  [JST04_1MM_RA]  78.99,134.62 90 top
J116  QWIIC_RIGHT_ANGLE  [JST04_1MM_RA]  63.75,134.62 270 top
J117  [1X05_NO_SILK]  66.29,127 0 top
J118  QWIIC_RIGHT_ANGLE  [JST04_1MM_RA]  104.9,134.62 90 top
J119  QWIIC_RIGHT_ANGLE  [JST04_1MM_RA]  89.66,134.62 270 top
J120  [1X05_NO_SILK]  92.2,127 0 top
J121  QWIIC_RIGHT_ANGLE  [JST04_1MM_RA]  27.18,147.83 90 top
J122  QWIIC_RIGHT_ANGLE  [JST04_1MM_RA]  11.94,147.83 270 top
J123  [1X05_NO_SILK]  14.48,140.21 0 top
J124  QWIIC_RIGHT_ANGLE  [JST04_1MM_RA]  53.09,147.83 90 top
J125  QWIIC_RIGHT_ANGLE  [JST04_1MM_RA]  37.85,147.83 270 top
J126  [1X05_NO_SILK]  40.39,140.21 0 top
J127  QWIIC_RIGHT_ANGLE  [JST04_1MM_RA]  78.99,147.83 90 top
J128  QWIIC_RIGHT_ANGLE  [JST04_1MM_RA]  63.75,147.83 270 top
J129  [1X05_NO_SILK]  66.29,140.21 0 top
J130  QWIIC_RIGHT_ANGLE  [JST04_1MM_RA]  104.9,147.83 90 top
J131  QWIIC_RIGHT_ANGLE  [JST04_1MM_RA]  89.66,147.83 270 top
J132  [1X05_NO_SILK]  92.2,140.21 0 top
J133  QWIIC_RIGHT_ANGLE  [JST04_1MM_RA]  27.18,161.04 90 top
J134  QWIIC_RIGHT_ANGLE  [JST04_1MM_RA]  11.94,161.04 270 top
J135  [1X05_NO_SILK]  14.48,153.42 0 top
J136  QWIIC_RIGHT_ANGLE  [JST04_1MM_RA]  53.09,161.04 90 top
J137  QWIIC_RIGHT_ANGLE  [JST04_1MM_RA]  37.85,161.04 270 top
J138  [1X05_NO_SILK]  40.39,153.42 0 top
J139  QWIIC_RIGHT_ANGLE  [JST04_1MM_RA]  78.99,161.04 90 top
J140  QWIIC_RIGHT_ANGLE  [JST04_1MM_RA]  63.75,161.04 270 top
J141  [1X05_NO_SILK]  66.29,153.42 0 top
J142  QWIIC_RIGHT_ANGLE  [JST04_1MM_RA]  104.9,161.04 90 top
J143  QWIIC_RIGHT_ANGLE  [JST04_1MM_RA]  89.66,161.04 270 top
J144  [1X05_NO_SILK]  92.2,153.42 0 top
LED  JUMPER-SMT_2_NC_TRACE_SILK  [SMT-JUMPER_2_NC_TRACE_SILK]  12.75,18.08 180 bottom
LED1  JUMPER-SMT_2_NC_TRACE_SILK  [SMT-JUMPER_2_NC_TRACE_SILK]  38.66,18.08 180 bottom
LED2  JUMPER-SMT_2_NC_TRACE_SILK  [SMT-JUMPER_2_NC_TRACE_SILK]  64.57,18.08 180 bottom
LED3  JUMPER-SMT_2_NC_TRACE_SILK  [SMT-JUMPER_2_NC_TRACE_SILK]  90.47,18.08 180 bottom
LED4  JUMPER-SMT_2_NC_TRACE_SILK  [SMT-JUMPER_2_NC_TRACE_SILK]  12.75,31.29 180 bottom
LED5  JUMPER-SMT_2_NC_TRACE_SILK  [SMT-JUMPER_2_NC_TRACE_SILK]  38.66,31.29 180 bottom
LED6  JUMPER-SMT_2_NC_TRACE_SILK  [SMT-JUMPER_2_NC_TRACE_SILK]  64.57,31.29 180 bottom